# EAGLE board Dual-Port_Logging_Shield-Panel (EAGLE 9.6.2), part 1 of 9
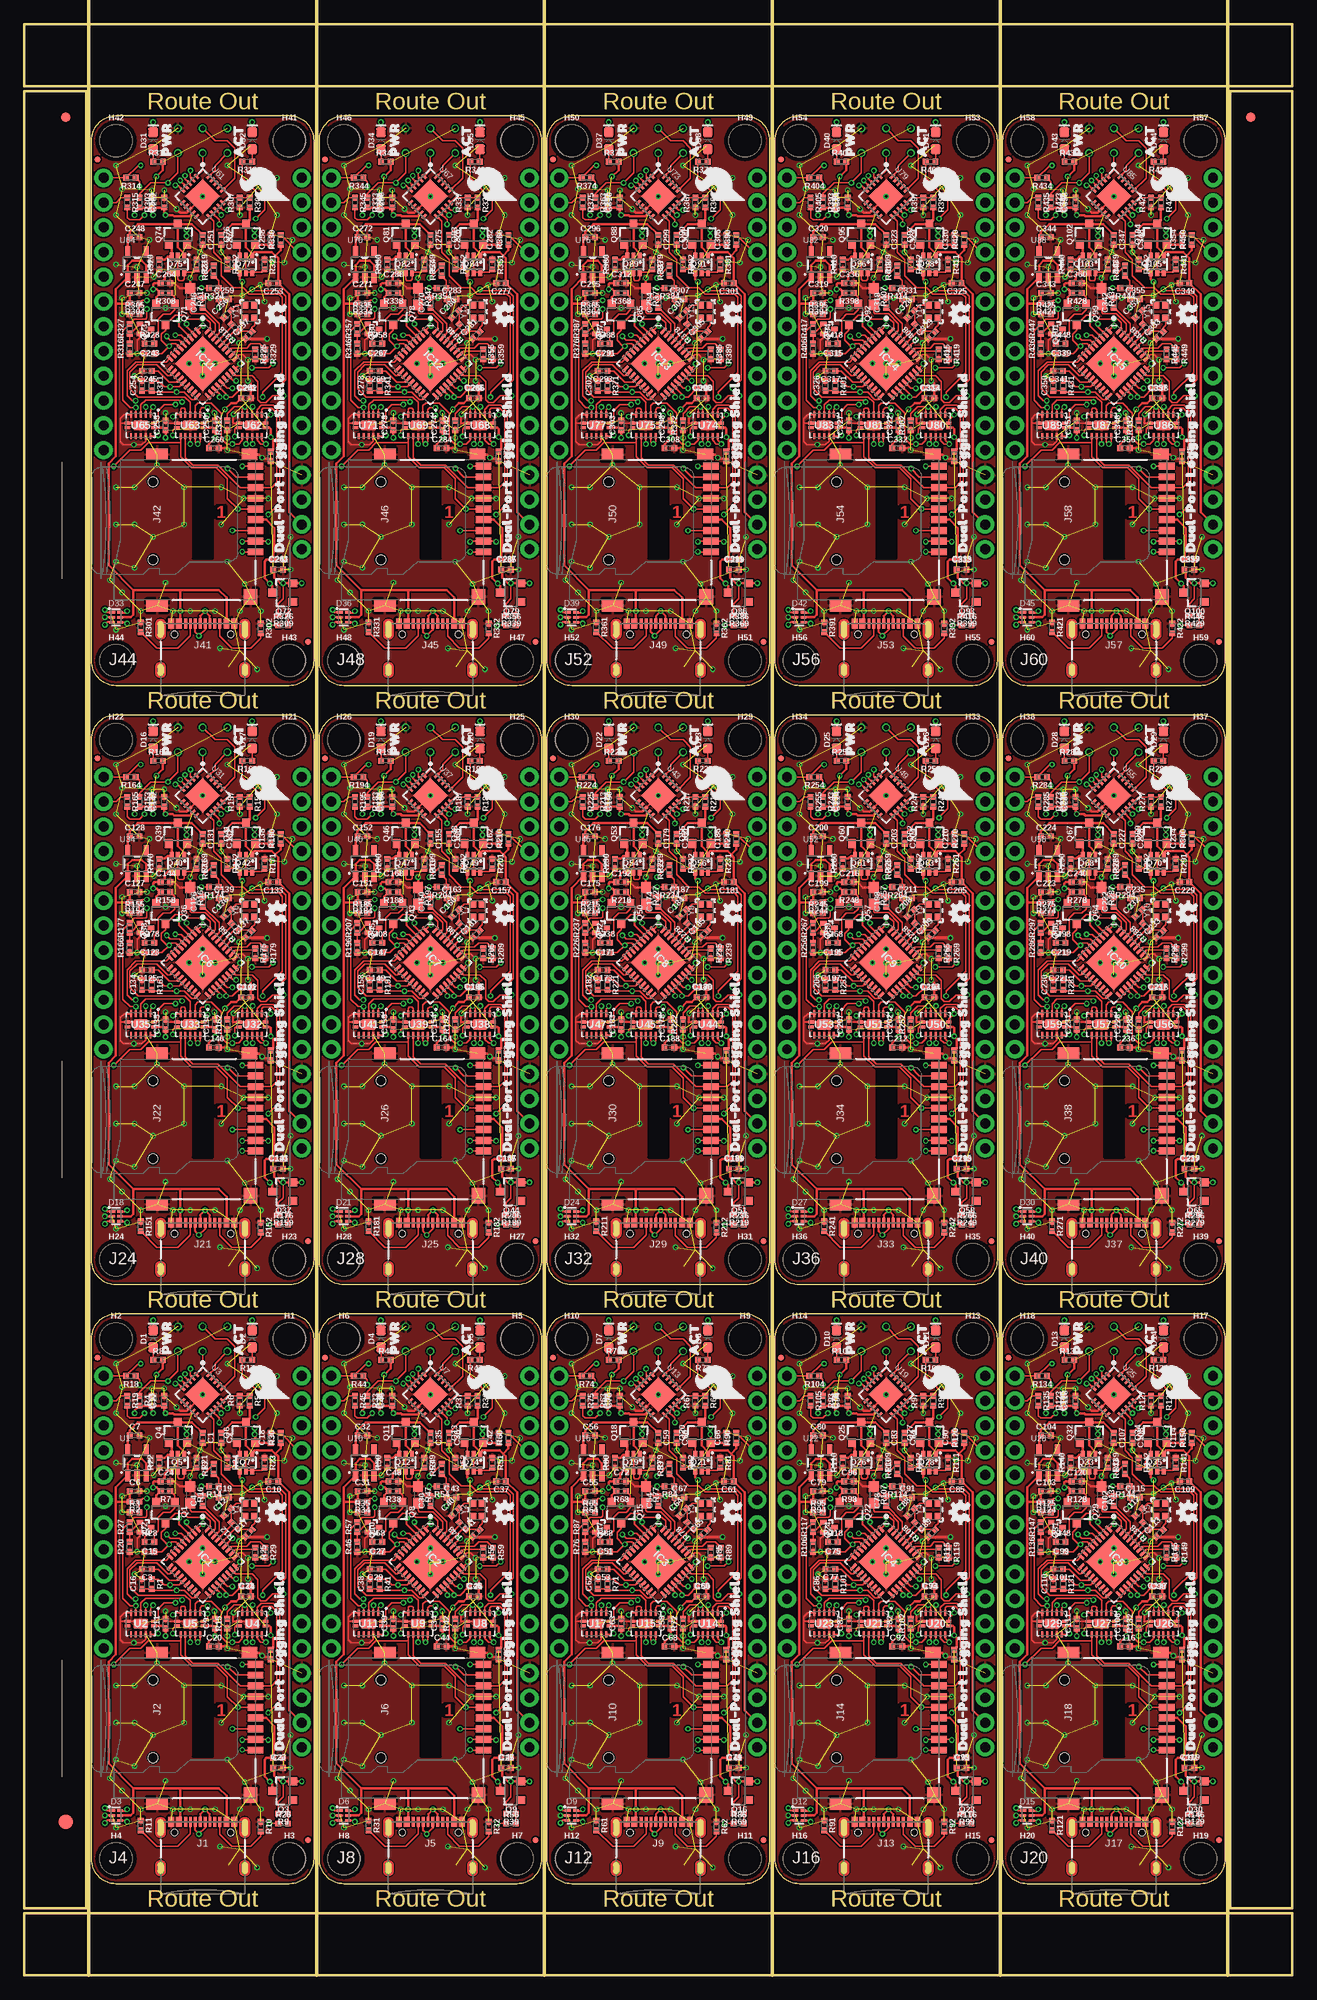
[diagram p0: board, top side]
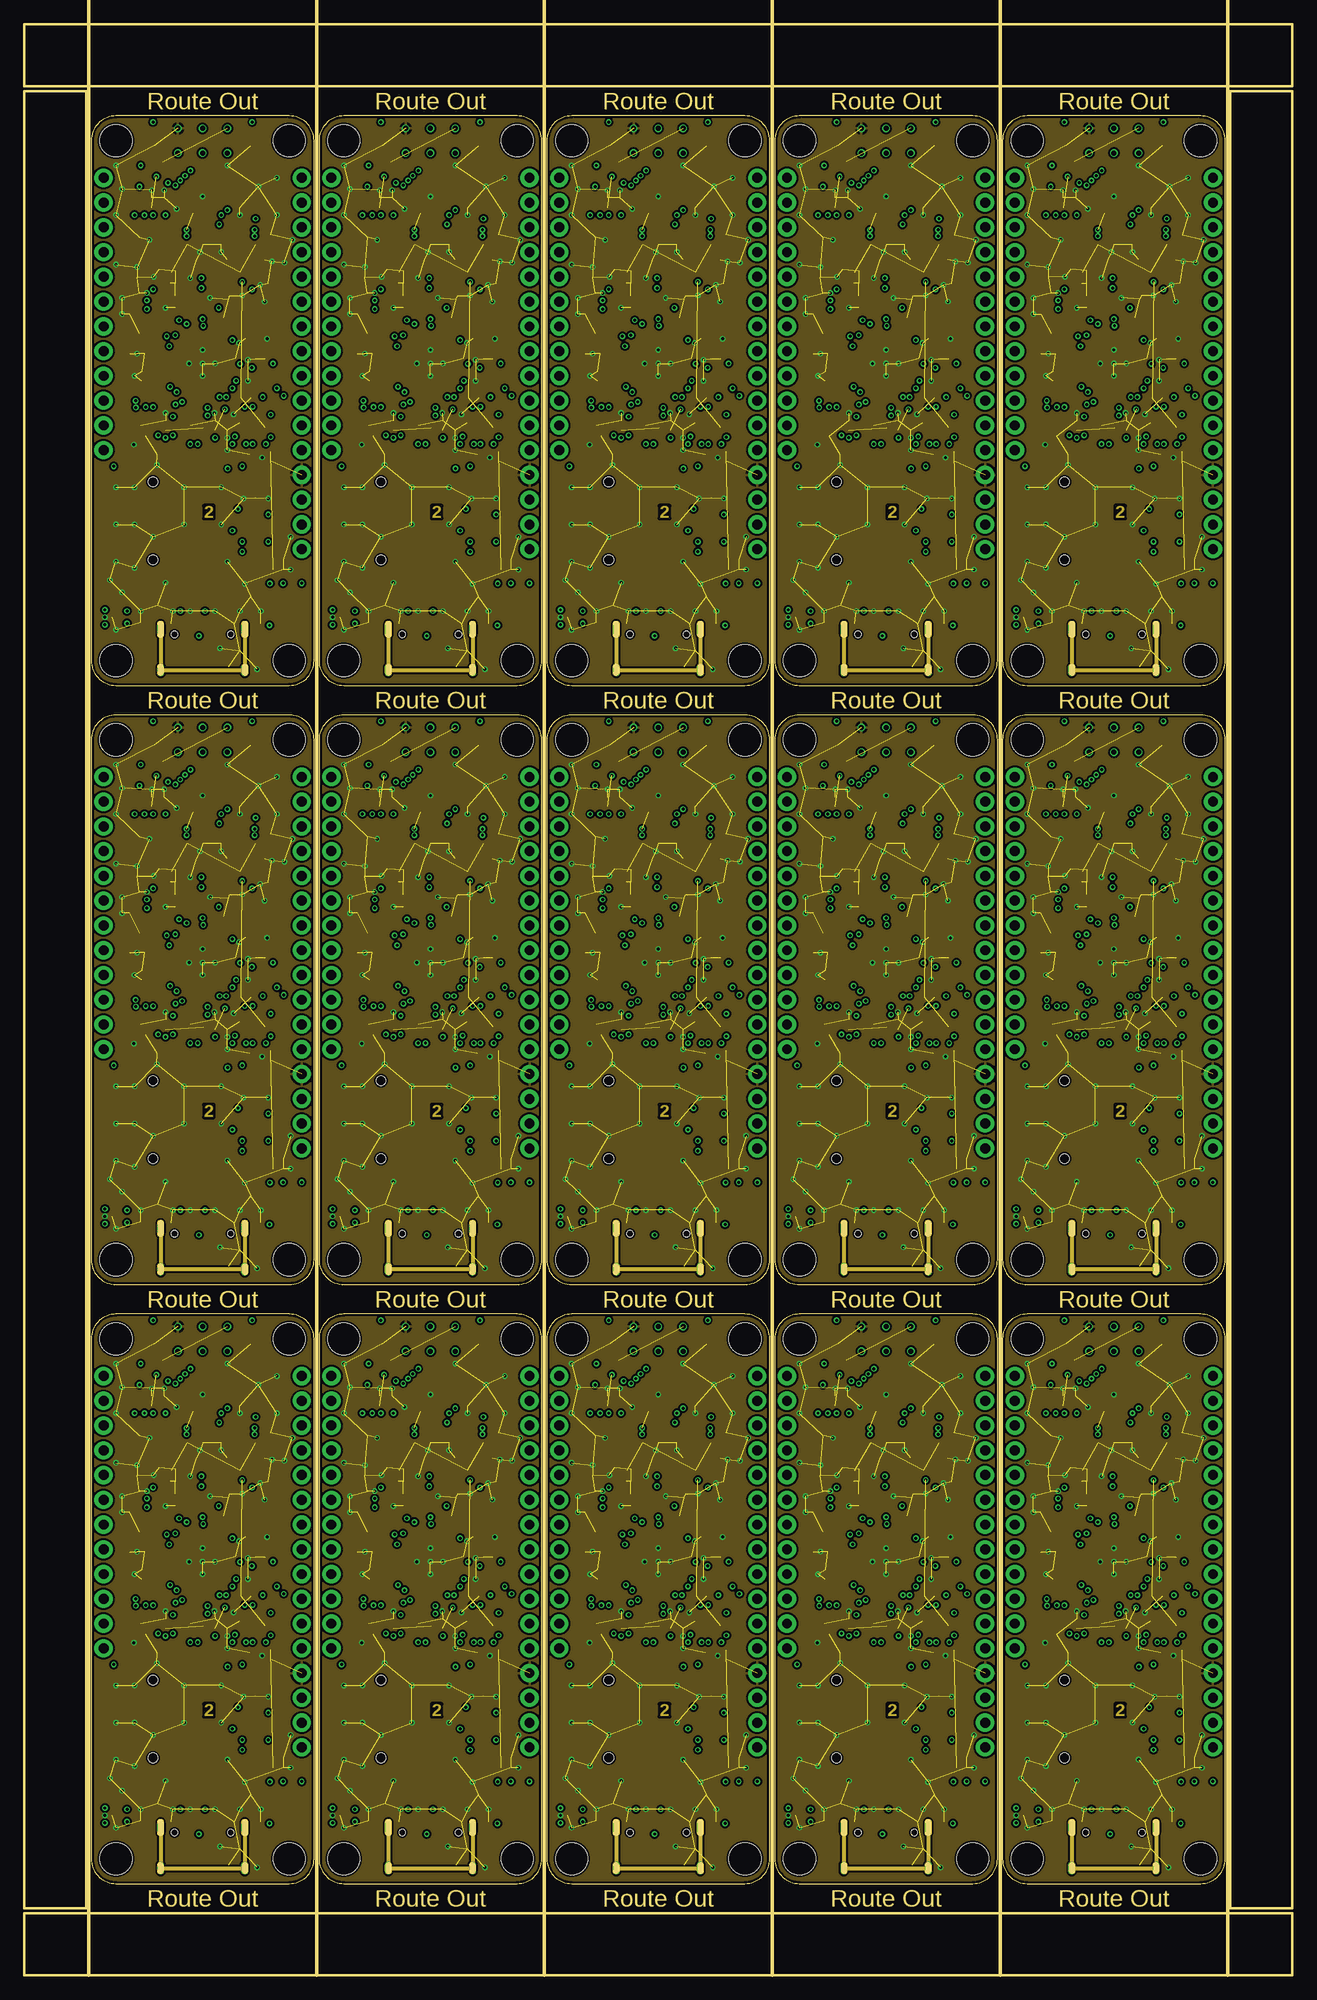
[diagram p1: board, inner layer Route2]
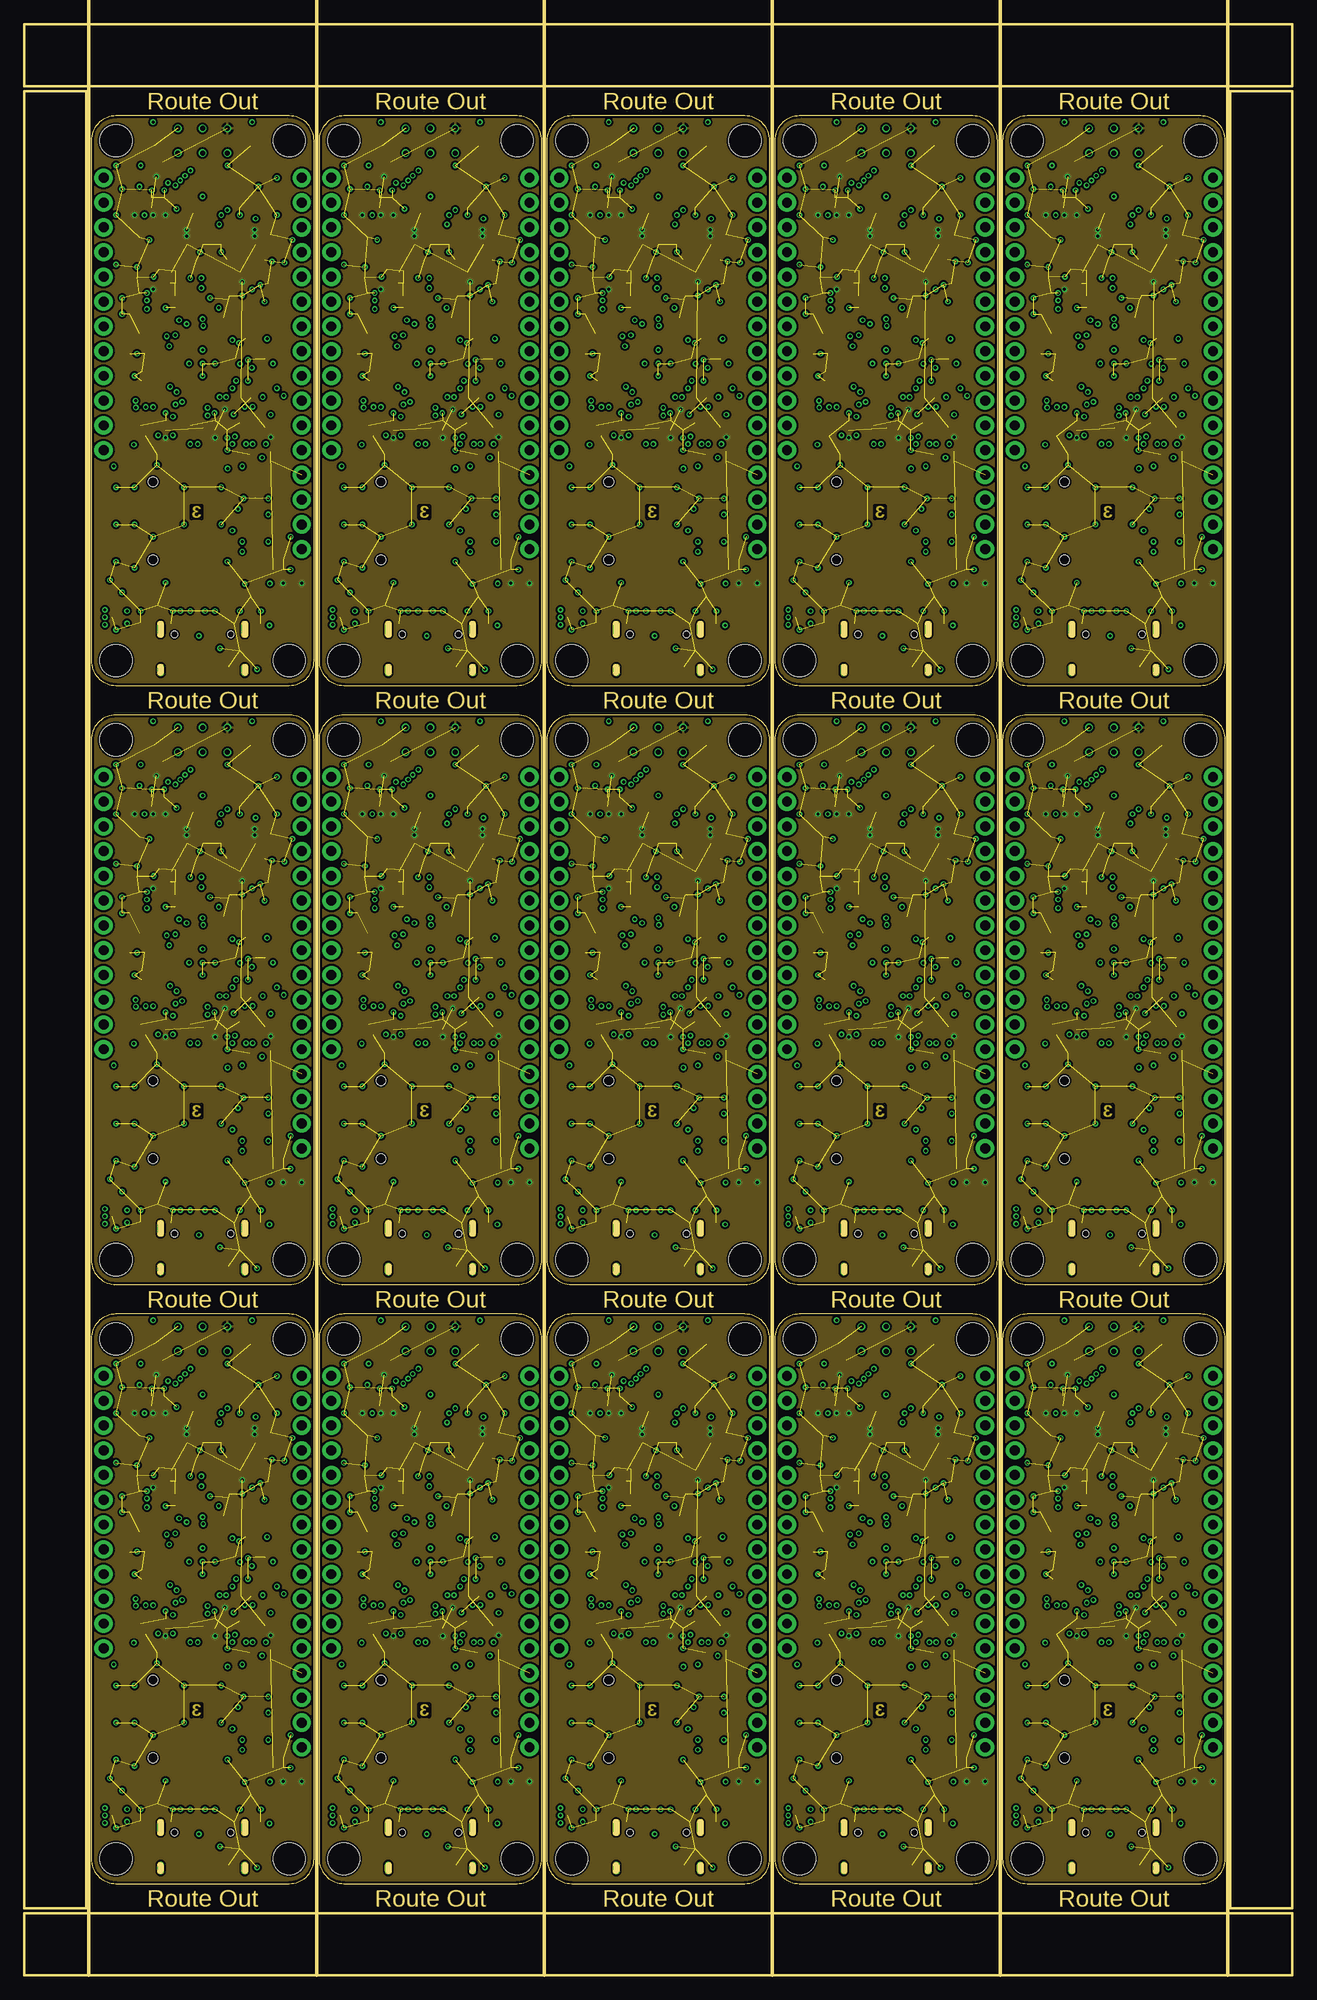
[diagram p2: board, inner layer Route15]
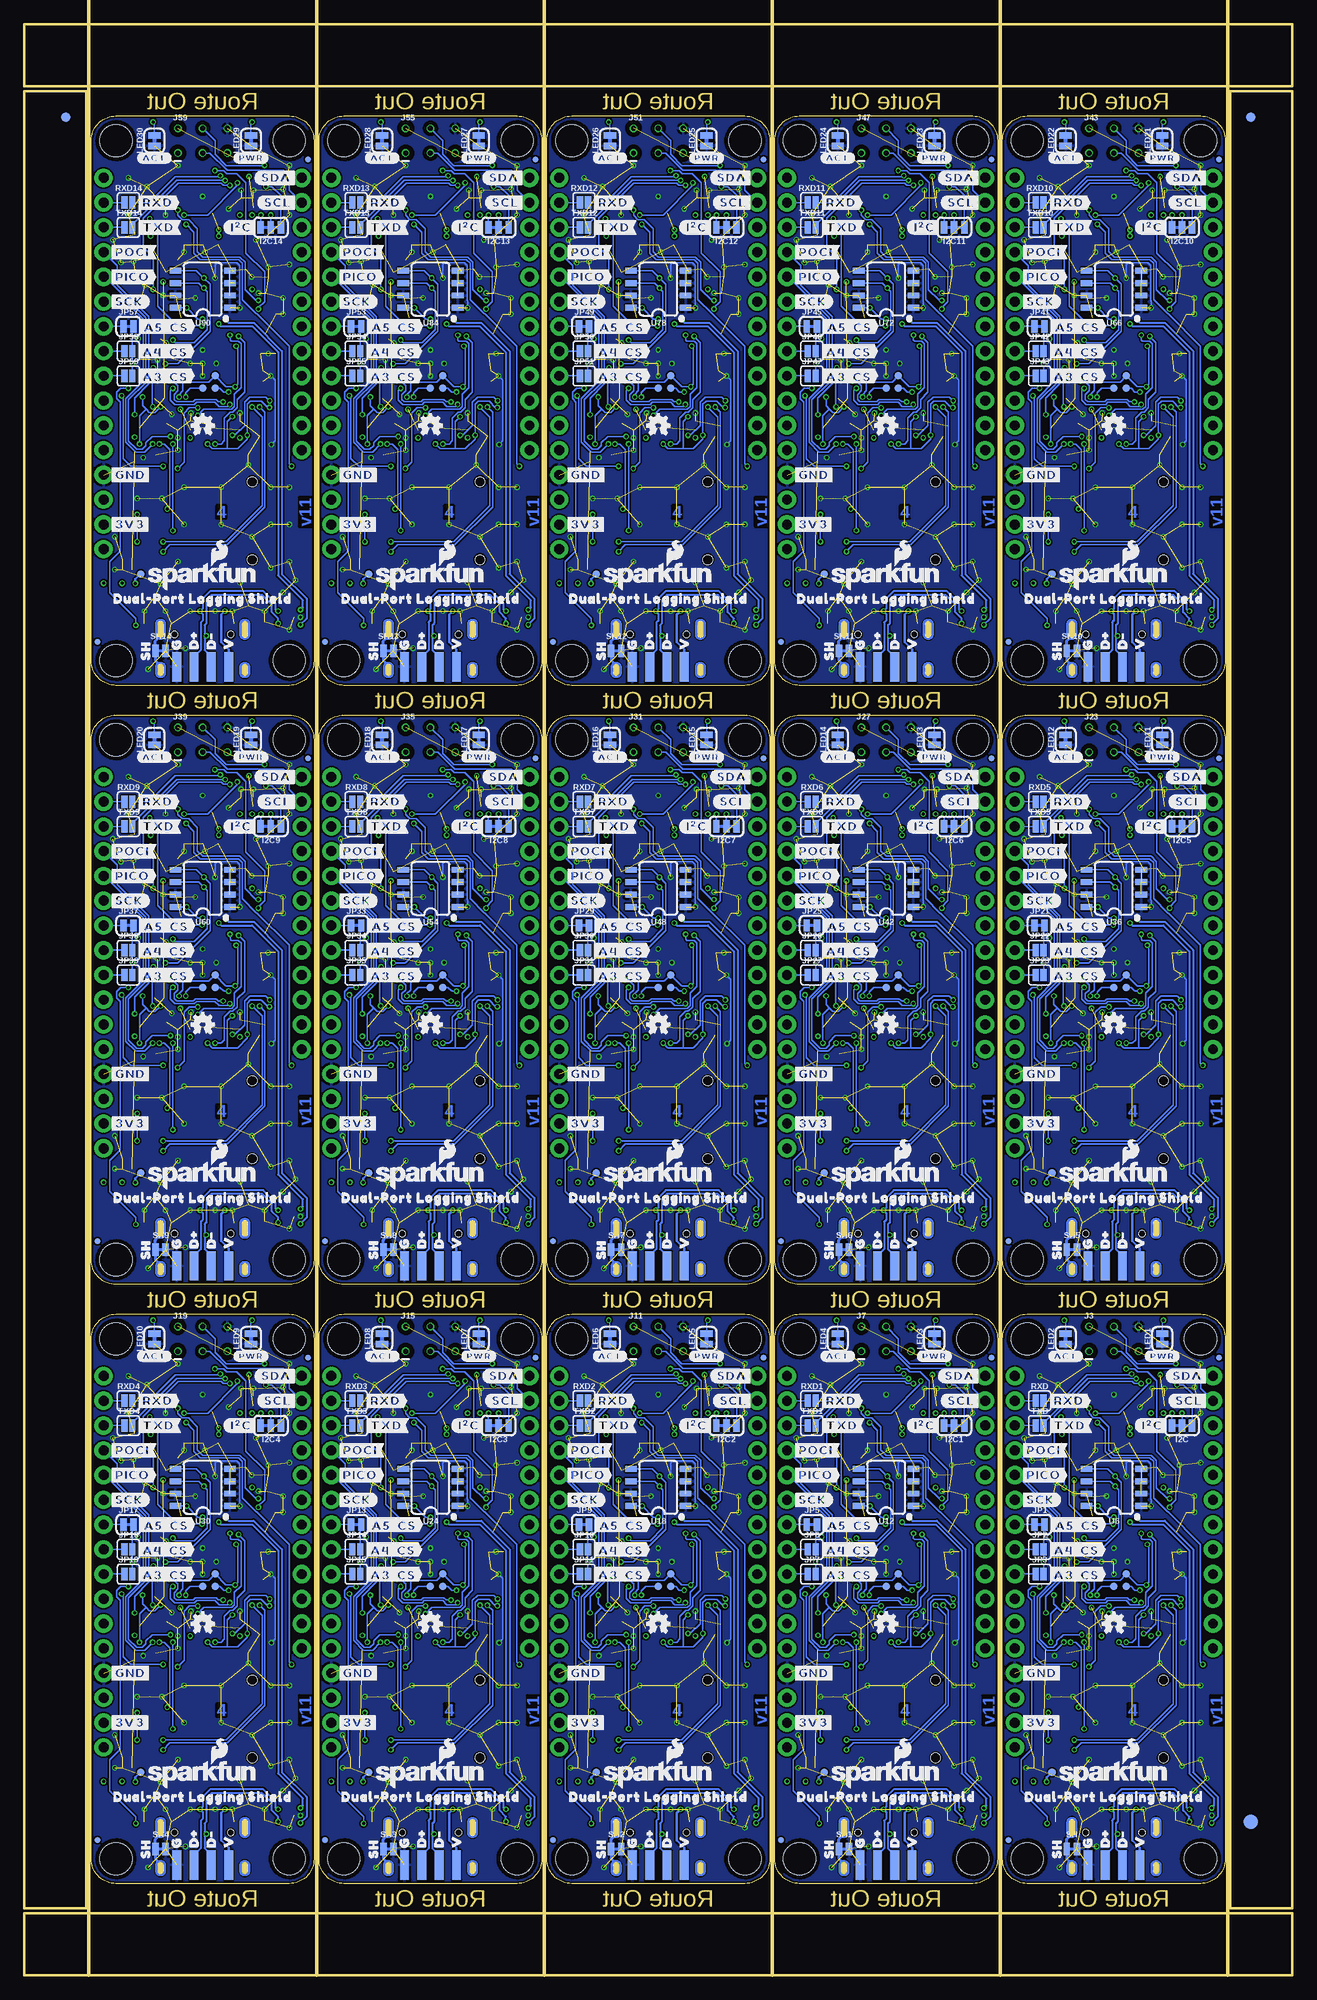
[diagram p3: board, bottom side, seen from below]

Size 130.05 x 200.15 mm. Coordinates in mm from the lower left corner, seen from the top.
Outline: 136 segments
Copper layers (1*2*15*16): Top 0.035559375mm / dielectric 0.47751875mm / Route2 0.035559375mm / dielectric 0.47751875mm / Route15 0.035559375mm / dielectric 0.47751875mm / Bottom 0.035559375mm
Design rules "Dual-Port_Logging_Shield": minimum track width 5mil, minimum drill 0.2mm, track to track 5mil, track to pad 5mil, pad to pad 5mil, via to via 5mil, smd to smd 5mil, copper to edge 7mil, drill to drill 7mil, minimum pad ring 5mil, minimum via ring 5mil, stop-mask expansion 2.5mil, vias tented up to drill 25mil, thermal gap 10mil
bRestrict: area 15.1,63.4 to 16.4,64.6; area 20.2,63.4 to 21.5,64.6; area 20.2,65.9 to 21.5,67.2; area 38.5,63.4 to 39.8,64.6; area 43.6,63.4 to 44.8,64.6; area 43.6,65.9 to 44.8,67.2; area 61.8,63.4 to 63.1,64.6; area 66.9,63.4 to 68.2,64.6; area 66.9,65.9 to 68.2,67.2; area 85.2,63.4 to 86.5,64.6; area 90.3,63.4 to 91.6,64.6; area 90.3,65.9 to 91.6,67.2; 33 more areas; 30 lines
Milling: 6 lines

## Footprints (pad centres in the part's own frame; a part is rotated, then mirrored left to right if it is on the bottom)
0402-TIGHT = smd 0.6 x 0.6: 1 -0.5,0; 2 0.5,0
LED-0603 = smd 1 x 1: A -0.877,0; C 0.877,0
SOT886 = smd 0.61 x 0.25: 1 -0.405,0.5 | smd 0.56 x 0.25: 2 -0.43,0; 3 -0.43,-0.5; 4 0.43,-0.5; 5 0.43,0; 6 0.43,0.5
FIDUCIAL-1X2 = smd 1 x 1: 1 0,0
FIDUCIAL-1.5X3 = smd 1.5 x 1.5: 1 0,0
FIDUCIAL-MICRO = smd 0.635 x 0.635: 1 0,0
PAD.03X.03 = smd 0.762 x 0.762: 1 0,0
STAND-OFF = hole 3.302: 0,0
SMT-JUMPER_3_2-NC_TRACE_SILK = smd 0.66 x 1.27: 1 -1.041,0; 2 0,0; 3 1.041,0
36-QFN = smd 0.8 x 0.25: 1 -2.75,2; 2 -2.75,1.5; 3 -2.75,1; 4 -2.75,0.5; 5 -2.75,0; 6 -2.75,-0.5; 7 -2.75,-1; 8 -2.75,-1.5; 9 -2.75,-2; 19 2.75,-2; 20 2.75,-1.5; 21 2.75,-1; 22 2.75,-0.5; 23 2.75,0; 24 2.75,0.5; 25 2.75,1; 26 2.75,1.5; 27 2.75,2 | smd 0.25 x 0.8: 10 -2,-2.75; 11 -1.5,-2.75; 12 -1,-2.75; 13 -0.5,-2.75; 14 0,-2.75; 15 0.5,-2.75; 16 1,-2.75; 17 1.5,-2.75; 18 2,-2.75; 28 2,2.75; 29 1.5,2.75; 30 1,2.75; 31 0.5,2.75; 32 0,2.75; 33 -0.5,2.75; 34 -1,2.75; 35 -1.5,2.75; 36 -2,2.75 | smd 4 x 4: EPAD 0,0
USB-C-16P_4LAYER-PADS = smd 0.3 x 1: A5 -1.25,-0.34; A6 -0.25,-0.34; A7 0.25,-0.34; A8 1.25,-0.34; B5 1.75,-0.34; B6 0.75,-0.34; B7 -0.75,-0.34; B8 -1.75,-0.34 | smd 0.6 x 1: GND -3.225,-0.34; GND2 3.225,-0.34; VBUS1 -2.45,-0.34; VBUS2 2.45,-0.34 | drill 0.4 pad 0.6 long: SHLD1 -4.318,-0.915; SHLD2 4.318,-0.915; SHLD3 -4.318,-5.095; SHLD4 4.318,-5.095 | hole 0.65: -2.89,-1.445; 2.89,-1.445
MICROSD-EXTERNALPIN = smd 0.7 x 1.6: 1 2.25,10.5; 2 1.15,10.5; 3 0.05,10.5; 4 -1.05,10.5; 5 -2.15,10.5; 6 -3.25,10.5; 7 -4.35,10.5; 8 -5.45,10.5; 9 -6.55,10.5 | smd 1.2 x 1.6: 10 -7.75,9.9 | smd 1.2 x 2.2: 11 -7.75,0.4; 12 7.75,0.4 | smd 1.6 x 1.4: 13 6.85,10 | hole 1: 3.05,0; -4.95,0
2X3_TEST_POINTS = drill 0.508: 1 -2.54,-1.27; 2 -2.54,1.27; 3 0,-1.27; 4 0,1.27; 5 2.54,-1.27; 6 2.54,1.27
THING_PLUS = drill 1.016 pad 1.88: 1 1.27,52.07; 2 1.27,49.53; 3 1.27,46.99; 4 1.27,44.45; 5 1.27,41.91; 6 1.27,39.37; 7 1.27,36.83; 8 1.27,34.29; 9 1.27,31.75; 10 1.27,29.21; 11 1.27,26.67; 12 1.27,24.13; 13 21.59,52.07; 14 21.59,49.53; 15 21.59,46.99; 16 21.59,44.45; 17 21.59,41.91; 18 21.59,39.37; 19 21.59,36.83; 20 21.59,34.29; 21 21.59,31.75; 22 21.59,29.21; 23 21.59,26.67; 24 21.59,24.13; 25 21.59,21.59; 26 21.59,19.05; 27 21.59,16.51; 28 21.59,13.97
SMT-JUMPER_2_NC_TRACE_SILK = smd 0.66 x 1.27: 1 -0.521,0; 2 0.521,0
SMT-JUMPER_2_NO_SILK = smd 0.635 x 1.27: 1 -0.406,0; 2 0.406,0
USB-SOLDER-PADS = smd 3 x 0.9: D+ 0,-0.889; D- 0,0.889; GND 0,-2.667; VBUS 0,2.667
SOT23-3 = smd 0.8 x 0.9: 1 -0.95,-1; 2 0.95,-1; 3 0,1.1
SOT-416FL = smd 0.46 x 0.65: 1 -0.5,-1.1; 2 0.5,-1.1; 3 0,0.05
SOT363_PHILIPS = smd 0.4 x 0.8: 1 -0.65,-0.8; 2 0,-0.8; 3 0.65,-0.8; 4 0.65,0.8; 5 0,0.8; 6 -0.65,0.8
0603 = smd 1.1 x 1: 1 -0.85,0; 2 0.85,0
SMT-JUMPER_2_NC_TRACE_NO-SILK = smd 0.66 x 1.27: 1 -0.521,0; 2 0.521,0
SOT23-5 = smd 0.55 x 1.2: 1 -0.95,-1.3; 2 0,-1.3; 3 0.95,-1.3; 4 0.95,1.3; 5 -0.95,1.3
14-QFN = smd 0.25 x 0.6: 1 -0.25,1.35; 7 -0.25,-1.35; 8 0.25,-1.35; 14 0.25,1.35 | smd 0.6 x 0.25: 2 -1.1,1; 3 -1.1,0.5; 4 -1.1,0; 5 -1.1,-0.5; 6 -1.1,-1; 9 1.1,-1; 10 1.1,-0.5; 11 1.1,0; 12 1.1,0.5; 13 1.1,1 | smd 1 x 1.5: EPAD 0,0
QFN20_20M1 = smd 0.6 x 0.25: 1 -1.9,1; 2 -1.9,0.5; 3 -1.9,0; 4 -1.9,-0.5; 5 -1.9,-1; 11 1.9,-1; 12 1.9,-0.5; 13 1.9,0; 14 1.9,0.5; 15 1.9,1 | smd 0.25 x 0.6: 6 -1,-1.9; 7 -0.5,-1.9; 8 0,-1.9; 9 0.5,-1.9; 10 1,-1.9; 16 1,1.9; 17 0.5,1.9; 18 0,1.9; 19 -0.5,1.9; 20 -1,1.9 | smd 2.5 x 2.5: PAD 0,0
SO08 = smd 0.6 x 1.2: 1 -1.905,-2.8; 2 -0.635,-2.8; 3 0.635,-2.8; 4 1.905,-2.8; 5 1.905,2.8; 6 0.635,2.8; 7 -0.635,2.8; 8 -1.905,2.8
CRYSTAL-SMD-2.0X1.6MM = smd 0.75 x 0.7: 1 -0.675,-0.5; 2 0.675,-0.5; 3 0.675,0.5; 4 -0.675,0.5

## Placement (x,y rotation side)
C1  0.1uF  [0402-TIGHT]  18.29,55.12 270 top
C2  0.1uF  [0402-TIGHT]  20.19,55.12 270 top
C3  2.2uF  [0402-TIGHT]  12.57,41.66 180 top
C4  2.2uF  [0402-TIGHT]  18.29,48.64 90 top
C5  0.1uF  [0402-TIGHT]  26.04,22.29 0 top
C6  2.2uF  [0402-TIGHT]  11.3,49.66 0 top
C7  2.2uF  [0402-TIGHT]  11.3,55.37 0 top
C8  0.1uF  [0402-TIGHT]  25.27,32.89 270 top
C9  0.1uF  [0402-TIGHT]  19.56,36.07 90 top
C10  2.2uF  [0402-TIGHT]  25.53,50.67 180 top
C11  0.1uF  [0402-TIGHT]  14.48,36.07 90 top
C12  12pF  [0402-TIGHT]  20.83,47.5 45 top
C13  0.1uF  [0402-TIGHT]  13.08,58.93 90 top
C14  0.1uF  [0402-TIGHT]  22.73,39.88 0 top
C15  2.2uF  [0402-TIGHT]  12.83,43.43 180 top
C16  0.1uF  [0402-TIGHT]  12.06,40.13 90 top
C17  12pF  [0402-TIGHT]  22.99,45.34 45 top
C18  2.2uF  [0402-TIGHT]  25.27,55.12 90 top
C19  0.1uF  [0402-TIGHT]  20.45,49.02 0 top
C20  10uF  [0402-TIGHT]  19.43,33.72 0 top
C21  10uF  [0402-TIGHT]  22.73,38.86 0 top
C22  10uF  [0402-TIGHT]  14.35,58.93 90 top
C23  10uF  [0402-TIGHT]  26.04,21.27 0 top
C24  10uF  [0402-TIGHT]  14.48,50.67 0 top
C25  0.1uF  [0402-TIGHT]  49.4,22.29 0 top
C26  0.1uF  [0402-TIGHT]  46.1,39.88 0 top
C27  2.2uF  [0402-TIGHT]  36.2,43.43 180 top
C28  0.1uF  [0402-TIGHT]  36.45,58.93 90 top
C29  2.2uF  [0402-TIGHT]  35.94,41.66 180 top
C30  2.2uF  [0402-TIGHT]  41.66,48.64 90 top
C31  2.2uF  [0402-TIGHT]  34.67,49.66 0 top
C32  2.2uF  [0402-TIGHT]  34.67,55.37 0 top
C33  0.1uF  [0402-TIGHT]  48.64,32.89 270 top
C34  0.1uF  [0402-TIGHT]  42.93,36.07 90 top
C35  0.1uF  [0402-TIGHT]  41.66,55.12 270 top
C36  0.1uF  [0402-TIGHT]  43.56,55.12 270 top
C37  2.2uF  [0402-TIGHT]  48.89,50.67 180 top
C38  0.1uF  [0402-TIGHT]  35.43,40.13 90 top
C39  0.1uF  [0402-TIGHT]  37.85,36.07 90 top
C40  12pF  [0402-TIGHT]  44.2,47.5 45 top
C41  12pF  [0402-TIGHT]  46.35,45.34 45 top
C42  2.2uF  [0402-TIGHT]  48.64,55.12 90 top
C43  0.1uF  [0402-TIGHT]  43.81,49.02 0 top
C44  10uF  [0402-TIGHT]  42.8,33.72 0 top
C45  10uF  [0402-TIGHT]  46.1,38.86 0 top
C46  10uF  [0402-TIGHT]  37.72,58.93 90 top
C47  10uF  [0402-TIGHT]  49.4,21.27 0 top
C48  10uF  [0402-TIGHT]  37.85,50.67 0 top
C49  0.1uF  [0402-TIGHT]  72.77,22.29 0 top
C50  0.1uF  [0402-TIGHT]  69.47,39.88 0 top
C51  2.2uF  [0402-TIGHT]  59.56,43.43 180 top
C52  0.1uF  [0402-TIGHT]  59.82,58.93 90 top
C53  2.2uF  [0402-TIGHT]  59.31,41.66 180 top
C54  2.2uF  [0402-TIGHT]  65.02,48.64 90 top
C55  2.2uF  [0402-TIGHT]  58.04,49.66 0 top
C56  2.2uF  [0402-TIGHT]  58.04,55.37 0 top
C57  0.1uF  [0402-TIGHT]  72.01,32.89 270 top
C58  0.1uF  [0402-TIGHT]  66.29,36.07 90 top
C59  0.1uF  [0402-TIGHT]  65.02,55.12 270 top
C60  0.1uF  [0402-TIGHT]  66.93,55.12 270 top
C61  2.2uF  [0402-TIGHT]  72.26,50.67 180 top
C62  0.1uF  [0402-TIGHT]  58.8,40.13 90 top
C63  0.1uF  [0402-TIGHT]  61.21,36.07 90 top
C64  12pF  [0402-TIGHT]  67.56,47.5 45 top
C65  12pF  [0402-TIGHT]  69.72,45.34 45 top
C66  2.2uF  [0402-TIGHT]  72.01,55.12 90 top
C67  0.1uF  [0402-TIGHT]  67.18,49.02 0 top
C68  10uF  [0402-TIGHT]  66.17,33.72 0 top
C69  10uF  [0402-TIGHT]  69.47,38.86 0 top
C70  10uF  [0402-TIGHT]  61.09,58.93 90 top
C71  10uF  [0402-TIGHT]  72.77,21.27 0 top
C72  10uF  [0402-TIGHT]  61.21,50.67 0 top
C73  0.1uF  [0402-TIGHT]  96.14,22.29 0 top
C74  0.1uF  [0402-TIGHT]  92.84,39.88 0 top
C75  2.2uF  [0402-TIGHT]  82.93,43.43 180 top
C76  0.1uF  [0402-TIGHT]  83.19,58.93 90 top
C77  2.2uF  [0402-TIGHT]  82.68,41.66 180 top
C78  2.2uF  [0402-TIGHT]  88.39,48.64 90 top
C79  2.2uF  [0402-TIGHT]  81.41,49.66 0 top
C80  2.2uF  [0402-TIGHT]  81.41,55.37 0 top
C81  0.1uF  [0402-TIGHT]  95.38,32.89 270 top
C82  0.1uF  [0402-TIGHT]  89.66,36.07 90 top
C83  0.1uF  [0402-TIGHT]  88.39,55.12 270 top
C84  0.1uF  [0402-TIGHT]  90.3,55.12 270 top
C85  2.2uF  [0402-TIGHT]  95.63,50.67 180 top
C86  0.1uF  [0402-TIGHT]  82.17,40.13 90 top
C87  0.1uF  [0402-TIGHT]  84.58,36.07 90 top
C88  12pF  [0402-TIGHT]  90.93,47.5 45 top
C89  12pF  [0402-TIGHT]  93.09,45.34 45 top
C90  2.2uF  [0402-TIGHT]  95.38,55.12 90 top
C91  0.1uF  [0402-TIGHT]  90.55,49.02 0 top
C92  10uF  [0402-TIGHT]  89.54,33.72 0 top
C93  10uF  [0402-TIGHT]  92.84,38.86 0 top
C94  10uF  [0402-TIGHT]  84.45,58.93 90 top
C95  10uF  [0402-TIGHT]  96.14,21.27 0 top
C96  10uF  [0402-TIGHT]  84.58,50.67 0 top
C97  0.1uF  [0402-TIGHT]  119.51,22.29 0 top
C98  0.1uF  [0402-TIGHT]  116.2,39.88 0 top
C99  2.2uF  [0402-TIGHT]  106.3,43.43 180 top
C100  0.1uF  [0402-TIGHT]  106.55,58.93 90 top
C101  2.2uF  [0402-TIGHT]  106.05,41.66 180 top
C102  2.2uF  [0402-TIGHT]  111.76,48.64 90 top
C103  2.2uF  [0402-TIGHT]  104.78,49.66 0 top
C104  2.2uF  [0402-TIGHT]  104.78,55.37 0 top
C105  0.1uF  [0402-TIGHT]  118.75,32.89 270 top
C106  0.1uF  [0402-TIGHT]  113.03,36.07 90 top
C107  0.1uF  [0402-TIGHT]  111.76,55.12 270 top
C108  0.1uF  [0402-TIGHT]  113.67,55.12 270 top
C109  2.2uF  [0402-TIGHT]  119,50.67 180 top
C110  0.1uF  [0402-TIGHT]  105.54,40.13 90 top
C111  0.1uF  [0402-TIGHT]  107.95,36.07 90 top
C112  12pF  [0402-TIGHT]  114.3,47.5 45 top
C113  12pF  [0402-TIGHT]  116.46,45.34 45 top
C114  2.2uF  [0402-TIGHT]  118.75,55.12 90 top
C115  0.1uF  [0402-TIGHT]  113.92,49.02 0 top
C116  10uF  [0402-TIGHT]  112.9,33.72 0 top
C117  10uF  [0402-TIGHT]  116.2,38.86 0 top
C118  10uF  [0402-TIGHT]  107.82,58.93 90 top
C119  10uF  [0402-TIGHT]  119.51,21.27 0 top
C120  10uF  [0402-TIGHT]  107.95,50.67 0 top
C121  0.1uF  [0402-TIGHT]  26.04,83.76 0 top
C122  0.1uF  [0402-TIGHT]  22.73,101.35 0 top
C123  2.2uF  [0402-TIGHT]  12.83,104.9 180 top
C124  0.1uF  [0402-TIGHT]  13.08,120.4 90 top
C125  2.2uF  [0402-TIGHT]  12.57,103.12 180 top
C126  2.2uF  [0402-TIGHT]  18.29,110.11 90 top
C127  2.2uF  [0402-TIGHT]  11.3,111.12 0 top
C128  2.2uF  [0402-TIGHT]  11.3,116.84 0 top
C129  0.1uF  [0402-TIGHT]  25.27,94.36 270 top
C130  0.1uF  [0402-TIGHT]  19.56,97.54 90 top
C131  0.1uF  [0402-TIGHT]  18.29,116.59 270 top
C132  0.1uF  [0402-TIGHT]  20.19,116.59 270 top
C133  2.2uF  [0402-TIGHT]  25.53,112.14 180 top
C134  0.1uF  [0402-TIGHT]  12.06,101.6 90 top
C135  0.1uF  [0402-TIGHT]  14.48,97.54 90 top
C136  12pF  [0402-TIGHT]  20.83,108.97 45 top
C137  12pF  [0402-TIGHT]  22.99,106.81 45 top
C138  2.2uF  [0402-TIGHT]  25.27,116.59 90 top
C139  0.1uF  [0402-TIGHT]  20.45,110.49 0 top
C140  10uF  [0402-TIGHT]  19.43,95.19 0 top
C141  10uF  [0402-TIGHT]  22.73,100.33 0 top
C142  10uF  [0402-TIGHT]  14.35,120.4 90 top
C143  10uF  [0402-TIGHT]  26.04,82.74 0 top
C144  10uF  [0402-TIGHT]  14.48,112.14 0 top
C145  0.1uF  [0402-TIGHT]  49.4,83.76 0 top
C146  0.1uF  [0402-TIGHT]  46.1,101.35 0 top
C147  2.2uF  [0402-TIGHT]  36.2,104.9 180 top
C148  0.1uF  [0402-TIGHT]  36.45,120.4 90 top
C149  2.2uF  [0402-TIGHT]  35.94,103.12 180 top
C150  2.2uF  [0402-TIGHT]  41.66,110.11 90 top
C151  2.2uF  [0402-TIGHT]  34.67,111.12 0 top
C152  2.2uF  [0402-TIGHT]  34.67,116.84 0 top
C153  0.1uF  [0402-TIGHT]  48.64,94.36 270 top
C154  0.1uF  [0402-TIGHT]  42.93,97.54 90 top
C155  0.1uF  [0402-TIGHT]  41.66,116.59 270 top
C156  0.1uF  [0402-TIGHT]  43.56,116.59 270 top
C157  2.2uF  [0402-TIGHT]  48.89,112.14 180 top
C158  0.1uF  [0402-TIGHT]  35.43,101.6 90 top
C159  0.1uF  [0402-TIGHT]  37.85,97.54 90 top
C160  12pF  [0402-TIGHT]  44.2,108.97 45 top
C161  12pF  [0402-TIGHT]  46.35,106.81 45 top
C162  2.2uF  [0402-TIGHT]  48.64,116.59 90 top
C163  0.1uF  [0402-TIGHT]  43.81,110.49 0 top
C164  10uF  [0402-TIGHT]  42.8,95.19 0 top
C165  10uF  [0402-TIGHT]  46.1,100.33 0 top
C166  10uF  [0402-TIGHT]  37.72,120.4 90 top
C167  10uF  [0402-TIGHT]  49.4,82.74 0 top
C168  10uF  [0402-TIGHT]  37.85,112.14 0 top
C169  0.1uF  [0402-TIGHT]  72.77,83.76 0 top
C170  0.1uF  [0402-TIGHT]  69.47,101.35 0 top
C171  2.2uF  [0402-TIGHT]  59.56,104.9 180 top
C172  0.1uF  [0402-TIGHT]  59.82,120.4 90 top
C173  2.2uF  [0402-TIGHT]  59.31,103.12 180 top
C174  2.2uF  [0402-TIGHT]  65.02,110.11 90 top
C175  2.2uF  [0402-TIGHT]  58.04,111.12 0 top
C176  2.2uF  [0402-TIGHT]  58.04,116.84 0 top
C177  0.1uF  [0402-TIGHT]  72.01,94.36 270 top
C178  0.1uF  [0402-TIGHT]  66.29,97.54 90 top
C179  0.1uF  [0402-TIGHT]  65.02,116.59 270 top
C180  0.1uF  [0402-TIGHT]  66.93,116.59 270 top
C181  2.2uF  [0402-TIGHT]  72.26,112.14 180 top
C182  0.1uF  [0402-TIGHT]  58.8,101.6 90 top
C183  0.1uF  [0402-TIGHT]  61.21,97.54 90 top
C184  12pF  [0402-TIGHT]  67.56,108.97 45 top
C185  12pF  [0402-TIGHT]  69.72,106.81 45 top
C186  2.2uF  [0402-TIGHT]  72.01,116.59 90 top
C187  0.1uF  [0402-TIGHT]  67.18,110.49 0 top
C188  10uF  [0402-TIGHT]  66.17,95.19 0 top
C189  10uF  [0402-TIGHT]  69.47,100.33 0 top
C190  10uF  [0402-TIGHT]  61.09,120.4 90 top
C191  10uF  [0402-TIGHT]  72.77,82.74 0 top
C192  10uF  [0402-TIGHT]  61.21,112.14 0 top
C193  0.1uF  [0402-TIGHT]  96.14,83.76 0 top
C194  0.1uF  [0402-TIGHT]  92.84,101.35 0 top
C195  2.2uF  [0402-TIGHT]  82.93,104.9 180 top
C196  0.1uF  [0402-TIGHT]  83.19,120.4 90 top
C197  2.2uF  [0402-TIGHT]  82.68,103.12 180 top
C198  2.2uF  [0402-TIGHT]  88.39,110.11 90 top
C199  2.2uF  [0402-TIGHT]  81.41,111.12 0 top
C200  2.2uF  [0402-TIGHT]  81.41,116.84 0 top
C201  0.1uF  [0402-TIGHT]  95.38,94.36 270 top
C202  0.1uF  [0402-TIGHT]  89.66,97.54 90 top
C203  0.1uF  [0402-TIGHT]  88.39,116.59 270 top
C204  0.1uF  [0402-TIGHT]  90.3,116.59 270 top
C205  2.2uF  [0402-TIGHT]  95.63,112.14 180 top
C206  0.1uF  [0402-TIGHT]  82.17,101.6 90 top
C207  0.1uF  [0402-TIGHT]  84.58,97.54 90 top
C208  12pF  [0402-TIGHT]  90.93,108.97 45 top
C209  12pF  [0402-TIGHT]  93.09,106.81 45 top
C210  2.2uF  [0402-TIGHT]  95.38,116.59 90 top
C211  0.1uF  [0402-TIGHT]  90.55,110.49 0 top
C212  10uF  [0402-TIGHT]  89.54,95.19 0 top
C213  10uF  [0402-TIGHT]  92.84,100.33 0 top
C214  10uF  [0402-TIGHT]  84.45,120.4 90 top
C215  10uF  [0402-TIGHT]  96.14,82.74 0 top
C216  10uF  [0402-TIGHT]  84.58,112.14 0 top
C217  0.1uF  [0402-TIGHT]  119.51,83.76 0 top
C218  0.1uF  [0402-TIGHT]  116.2,101.35 0 top
C219  2.2uF  [0402-TIGHT]  106.3,104.9 180 top
C220  0.1uF  [0402-TIGHT]  106.55,120.4 90 top
C221  2.2uF  [0402-TIGHT]  106.05,103.12 180 top
C222  2.2uF  [0402-TIGHT]  111.76,110.11 90 top
C223  2.2uF  [0402-TIGHT]  104.78,111.12 0 top
C224  2.2uF  [0402-TIGHT]  104.78,116.84 0 top
C225  0.1uF  [0402-TIGHT]  118.75,94.36 270 top
C226  0.1uF  [0402-TIGHT]  113.03,97.54 90 top
C227  0.1uF  [0402-TIGHT]  111.76,116.59 270 top
C228  0.1uF  [0402-TIGHT]  113.67,116.59 270 top
C229  2.2uF  [0402-TIGHT]  119,112.14 180 top
C230  0.1uF  [0402-TIGHT]  105.54,101.6 90 top
C231  0.1uF  [0402-TIGHT]  107.95,97.54 90 top
C232  12pF  [0402-TIGHT]  114.3,108.97 45 top
C233  12pF  [0402-TIGHT]  116.46,106.81 45 top
C234  2.2uF  [0402-TIGHT]  118.75,116.59 90 top
C235  0.1uF  [0402-TIGHT]  113.92,110.49 0 top
C236  10uF  [0402-TIGHT]  112.9,95.19 0 top
C237  10uF  [0402-TIGHT]  116.2,100.33 0 top
C238  10uF  [0402-TIGHT]  107.82,120.4 90 top
C239  10uF  [0402-TIGHT]  119.51,82.74 0 top
C240  10uF  [0402-TIGHT]  107.95,112.14 0 top
C241  0.1uF  [0402-TIGHT]  26.04,145.22 0 top
C242  0.1uF  [0402-TIGHT]  22.73,162.81 0 top
C243  2.2uF  [0402-TIGHT]  12.83,166.37 180 top
C244  0.1uF  [0402-TIGHT]  13.08,181.86 90 top
C245  2.2uF  [0402-TIGHT]  12.57,164.59 180 top
C246  2.2uF  [0402-TIGHT]  18.29,171.58 90 top
C247  2.2uF  [0402-TIGHT]  11.3,172.59 0 top
C248  2.2uF  [0402-TIGHT]  11.3,178.31 0 top
C249  0.1uF  [0402-TIGHT]  25.27,155.83 270 top
C250  0.1uF  [0402-TIGHT]  19.56,159 90 top
C251  0.1uF  [0402-TIGHT]  18.29,178.05 270 top
C252  0.1uF  [0402-TIGHT]  20.19,178.05 270 top
C253  2.2uF  [0402-TIGHT]  25.53,173.61 180 top
C254  0.1uF  [0402-TIGHT]  12.06,163.07 90 top
C255  0.1uF  [0402-TIGHT]  14.48,159 90 top
C256  12pF  [0402-TIGHT]  20.83,170.43 45 top
C257  12pF  [0402-TIGHT]  22.99,168.28 45 top
C258  2.2uF  [0402-TIGHT]  25.27,178.05 90 top
C259  0.1uF  [0402-TIGHT]  20.45,171.96 0 top
C260  10uF  [0402-TIGHT]  19.43,156.65 0 top
C261  10uF  [0402-TIGHT]  22.73,161.8 0 top
C262  10uF  [0402-TIGHT]  14.35,181.86 90 top
C263  10uF  [0402-TIGHT]  26.04,144.21 0 top
C264  10uF  [0402-TIGHT]  14.48,173.61 0 top
C265  0.1uF  [0402-TIGHT]  49.4,145.22 0 top
C266  0.1uF  [0402-TIGHT]  46.1,162.81 0 top
C267  2.2uF  [0402-TIGHT]  36.2,166.37 180 top
C268  0.1uF  [0402-TIGHT]  36.45,181.86 90 top
C269  2.2uF  [0402-TIGHT]  35.94,164.59 180 top
C270  2.2uF  [0402-TIGHT]  41.66,171.58 90 top
C271  2.2uF  [0402-TIGHT]  34.67,172.59 0 top
C272  2.2uF  [0402-TIGHT]  34.67,178.31 0 top
C273  0.1uF  [0402-TIGHT]  48.64,155.83 270 top
C274  0.1uF  [0402-TIGHT]  42.93,159 90 top
C275  0.1uF  [0402-TIGHT]  41.66,178.05 270 top
C276  0.1uF  [0402-TIGHT]  43.56,178.05 270 top
C277  2.2uF  [0402-TIGHT]  48.89,173.61 180 top
C278  0.1uF  [0402-TIGHT]  35.43,163.07 90 top
C279  0.1uF  [0402-TIGHT]  37.85,159 90 top
C280  12pF  [0402-TIGHT]  44.2,170.43 45 top
C281  12pF  [0402-TIGHT]  46.35,168.28 45 top
C282  2.2uF  [0402-TIGHT]  48.64,178.05 90 top
C283  0.1uF  [0402-TIGHT]  43.81,171.96 0 top
C284  10uF  [0402-TIGHT]  42.8,156.65 0 top
C285  10uF  [0402-TIGHT]  46.1,161.8 0 top
C286  10uF  [0402-TIGHT]  37.72,181.86 90 top
C287  10uF  [0402-TIGHT]  49.4,144.21 0 top
C288  10uF  [0402-TIGHT]  37.85,173.61 0 top
C289  0.1uF  [0402-TIGHT]  72.77,145.22 0 top
C290  0.1uF  [0402-TIGHT]  69.47,162.81 0 top
C291  2.2uF  [0402-TIGHT]  59.56,166.37 180 top
C292  0.1uF  [0402-TIGHT]  59.82,181.86 90 top
C293  2.2uF  [0402-TIGHT]  59.31,164.59 180 top
C294  2.2uF  [0402-TIGHT]  65.02,171.58 90 top
C295  2.2uF  [0402-TIGHT]  58.04,172.59 0 top
C296  2.2uF  [0402-TIGHT]  58.04,178.31 0 top
C297  0.1uF  [0402-TIGHT]  72.01,155.83 270 top
C298  0.1uF  [0402-TIGHT]  66.29,159 90 top
C299  0.1uF  [0402-TIGHT]  65.02,178.05 270 top
C300  0.1uF  [0402-TIGHT]  66.93,178.05 270 top
C301  2.2uF  [0402-TIGHT]  72.26,173.61 180 top
C302  0.1uF  [0402-TIGHT]  58.8,163.07 90 top
C303  0.1uF  [0402-TIGHT]  61.21,159 90 top
C304  12pF  [0402-TIGHT]  67.56,170.43 45 top
C305  12pF  [0402-TIGHT]  69.72,168.28 45 top
C306  2.2uF  [0402-TIGHT]  72.01,178.05 90 top
C307  0.1uF  [0402-TIGHT]  67.18,171.96 0 top
C308  10uF  [0402-TIGHT]  66.17,156.65 0 top
C309  10uF  [0402-TIGHT]  69.47,161.8 0 top
C310  10uF  [0402-TIGHT]  61.09,181.86 90 top
C311  10uF  [0402-TIGHT]  72.77,144.21 0 top
C312  10uF  [0402-TIGHT]  61.21,173.61 0 top
C313  0.1uF  [0402-TIGHT]  96.14,145.22 0 top
C314  0.1uF  [0402-TIGHT]  92.84,162.81 0 top
C315  2.2uF  [0402-TIGHT]  82.93,166.37 180 top
C316  0.1uF  [0402-TIGHT]  83.19,181.86 90 top
C317  2.2uF  [0402-TIGHT]  82.68,164.59 180 top
C318  2.2uF  [0402-TIGHT]  88.39,171.58 90 top
C319  2.2uF  [0402-TIGHT]  81.41,172.59 0 top
C320  2.2uF  [0402-TIGHT]  81.41,178.31 0 top
C321  0.1uF  [0402-TIGHT]  95.38,155.83 270 top
C322  0.1uF  [0402-TIGHT]  89.66,159 90 top
C323  0.1uF  [0402-TIGHT]  88.39,178.05 270 top
C324  0.1uF  [0402-TIGHT]  90.3,178.05 270 top
C325  2.2uF  [0402-TIGHT]  95.63,173.61 180 top
C326  0.1uF  [0402-TIGHT]  82.17,163.07 90 top
C327  0.1uF  [0402-TIGHT]  84.58,159 90 top
C328  12pF  [0402-TIGHT]  90.93,170.43 45 top
C329  12pF  [0402-TIGHT]  93.09,168.28 45 top
C330  2.2uF  [0402-TIGHT]  95.38,178.05 90 top
C331  0.1uF  [0402-TIGHT]  90.55,171.96 0 top
C332  10uF  [0402-TIGHT]  89.54,156.65 0 top
C333  10uF  [0402-TIGHT]  92.84,161.8 0 top
C334  10uF  [0402-TIGHT]  84.45,181.86 90 top
C335  10uF  [0402-TIGHT]  96.14,144.21 0 top
C336  10uF  [0402-TIGHT]  84.58,173.61 0 top
C337  0.1uF  [0402-TIGHT]  119.51,145.22 0 top
C338  0.1uF  [0402-TIGHT]  116.2,162.81 0 top
C339  2.2uF  [0402-TIGHT]  106.3,166.37 180 top
C340  0.1uF  [0402-TIGHT]  106.55,181.86 90 top
C341  2.2uF  [0402-TIGHT]  106.05,164.59 180 top
C342  2.2uF  [0402-TIGHT]  111.76,171.58 90 top
C343  2.2uF  [0402-TIGHT]  104.78,172.59 0 top
C344  2.2uF  [0402-TIGHT]  104.78,178.31 0 top
C345  0.1uF  [0402-TIGHT]  118.75,155.83 270 top
C346  0.1uF  [0402-TIGHT]  113.03,159 90 top
C347  0.1uF  [0402-TIGHT]  111.76,178.05 270 top
C348  0.1uF  [0402-TIGHT]  113.67,178.05 270 top
C349  2.2uF  [0402-TIGHT]  119,173.61 180 top
C350  0.1uF  [0402-TIGHT]  105.54,163.07 90 top
C351  0.1uF  [0402-TIGHT]  107.95,159 90 top
C352  12pF  [0402-TIGHT]  114.3,170.43 45 top
C353  12pF  [0402-TIGHT]  116.46,168.28 45 top
C354  2.2uF  [0402-TIGHT]  118.75,178.05 90 top
C355  0.1uF  [0402-TIGHT]  113.92,171.96 0 top
C356  10uF  [0402-TIGHT]  112.9,156.65 0 top
C357  10uF  [0402-TIGHT]  116.2,161.8 0 top
C358  10uF  [0402-TIGHT]  107.82,181.86 90 top
C359  10uF  [0402-TIGHT]  119.51,144.21 0 top
C360  10uF  [0402-TIGHT]  107.95,173.61 0 top
D1  RED  [LED-0603]  13.21,65.28 90 top
D2  Yellow  [LED-0603]  23.37,65.28 90 top
D3  PRTR5V0U2F  [SOT886]  9.4,16.38 0 top
D4  RED  [LED-0603]  36.58,65.28 90 top
D5  Yellow  [LED-0603]  46.74,65.28 90 top
D6  PRTR5V0U2F  [SOT886]  32.77,16.38 0 top
D7  RED  [LED-0603]  59.94,65.28 90 top
D8  Yellow  [LED-0603]  70.1,65.28 90 top
D9  PRTR5V0U2F  [SOT886]  56.13,16.38 0 top
D10  RED  [LED-0603]  83.31,65.28 90 top
D11  Yellow  [LED-0603]  93.47,65.28 90 top
D12  PRTR5V0U2F  [SOT886]  79.5,16.38 0 top
D13  RED  [LED-0603]  106.68,65.28 90 top
D14  Yellow  [LED-0603]  116.84,65.28 90 top
D15  PRTR5V0U2F  [SOT886]  102.87,16.38 0 top
D16  RED  [LED-0603]  13.21,126.75 90 top
D17  Yellow  [LED-0603]  23.37,126.75 90 top
D18  PRTR5V0U2F  [SOT886]  9.4,77.85 0 top
D19  RED  [LED-0603]  36.58,126.75 90 top
D20  Yellow  [LED-0603]  46.74,126.75 90 top
D21  PRTR5V0U2F  [SOT886]  32.77,77.85 0 top
D22  RED  [LED-0603]  59.94,126.75 90 top
D23  Yellow  [LED-0603]  70.1,126.75 90 top
D24  PRTR5V0U2F  [SOT886]  56.13,77.85 0 top
D25  RED  [LED-0603]  83.31,126.75 90 top
D26  Yellow  [LED-0603]  93.47,126.75 90 top
D27  PRTR5V0U2F  [SOT886]  79.5,77.85 0 top
D28  RED  [LED-0603]  106.68,126.75 90 top
D29  Yellow  [LED-0603]  116.84,126.75 90 top
D30  PRTR5V0U2F  [SOT886]  102.87,77.85 0 top
D31  RED  [LED-0603]  13.21,188.21 90 top
D32  Yellow  [LED-0603]  23.37,188.21 90 top
D33  PRTR5V0U2F  [SOT886]  9.4,139.32 0 top
D34  RED  [LED-0603]  36.58,188.21 90 top
D35  Yellow  [LED-0603]  46.74,188.21 90 top
D36  PRTR5V0U2F  [SOT886]  32.77,139.32 0 top
D37  RED  [LED-0603]  59.94,188.21 90 top
D38  Yellow  [LED-0603]  70.1,188.21 90 top
D39  PRTR5V0U2F  [SOT886]  56.13,139.32 0 top
D40  RED  [LED-0603]  83.31,188.21 90 top
D41  Yellow  [LED-0603]  93.47,188.21 90 top
D42  PRTR5V0U2F  [SOT886]  79.5,139.32 0 top
D43  RED  [LED-0603]  106.68,188.21 90 top
D44  Yellow  [LED-0603]  116.84,188.21 90 top
D45  PRTR5V0U2F  [SOT886]  102.87,139.32 0 top
E$1  [FIDUCIAL-1X2]  4.23,190.63 0 top
E$2  [FIDUCIAL-1X2]  4.23,190.63 0 bottom
E$3  [FIDUCIAL-1X2]  125.81,190.63 0 top
E$4  [FIDUCIAL-1X2]  125.81,190.63 0 bottom
E$5  [FIDUCIAL-1.5X3]  4.23,15.75 0 top
E$6  [FIDUCIAL-1.5X3]  4.23,15.75 0 bottom
FD1  FIDUCIALUFIDUCIAL  [FIDUCIAL-MICRO]  7.49,63.37 0 top
FD2  FIDUCIALUFIDUCIAL  [FIDUCIAL-MICRO]  29.08,13.84 0 bottom
FD3  FIDUCIALUFIDUCIAL  [FIDUCIAL-MICRO]  29.08,13.84 0 top
FD4  FIDUCIALUFIDUCIAL  [FIDUCIAL-MICRO]  7.49,63.37 0 bottom
FD5  FIDUCIALUFIDUCIAL  [FIDUCIAL-MICRO]  30.86,63.37 0 top
FD6  FIDUCIALUFIDUCIAL  [FIDUCIAL-MICRO]  52.45,13.84 0 bottom
FD7  FIDUCIALUFIDUCIAL  [FIDUCIAL-MICRO]  52.45,13.84 0 top
FD8  FIDUCIALUFIDUCIAL  [FIDUCIAL-MICRO]  30.86,63.37 0 bottom
FD9  FIDUCIALUFIDUCIAL  [FIDUCIAL-MICRO]  54.23,63.37 0 top
FD10  FIDUCIALUFIDUCIAL  [FIDUCIAL-MICRO]  75.82,13.84 0 bottom
FD11  FIDUCIALUFIDUCIAL  [FIDUCIAL-MICRO]  75.82,13.84 0 top
FD12  FIDUCIALUFIDUCIAL  [FIDUCIAL-MICRO]  54.23,63.37 0 bottom
FD13  FIDUCIALUFIDUCIAL  [FIDUCIAL-MICRO]  77.6,63.37 0 top
FD14  FIDUCIALUFIDUCIAL  [FIDUCIAL-MICRO]  99.19,13.84 0 bottom
FD15  FIDUCIALUFIDUCIAL  [FIDUCIAL-MICRO]  99.19,13.84 0 top
FD16  FIDUCIALUFIDUCIAL  [FIDUCIAL-MICRO]  77.6,63.37 0 bottom
FD17  FIDUCIALUFIDUCIAL  [FIDUCIAL-MICRO]  100.97,63.37 0 top
FD18  FIDUCIALUFIDUCIAL  [FIDUCIAL-MICRO]  122.56,13.84 0 bottom
FD19  FIDUCIALUFIDUCIAL  [FIDUCIAL-MICRO]  122.56,13.84 0 top
FD20  FIDUCIALUFIDUCIAL  [FIDUCIAL-MICRO]  100.97,63.37 0 bottom
FD21  FIDUCIALUFIDUCIAL  [FIDUCIAL-MICRO]  7.49,124.84 0 top
FD22  FIDUCIALUFIDUCIAL  [FIDUCIAL-MICRO]  29.08,75.31 0 bottom
FD23  FIDUCIALUFIDUCIAL  [FIDUCIAL-MICRO]  29.08,75.31 0 top
FD24  FIDUCIALUFIDUCIAL  [FIDUCIAL-MICRO]  7.49,124.84 0 bottom
FD25  FIDUCIALUFIDUCIAL  [FIDUCIAL-MICRO]  30.86,124.84 0 top
FD26  FIDUCIALUFIDUCIAL  [FIDUCIAL-MICRO]  52.45,75.31 0 bottom
FD27  FIDUCIALUFIDUCIAL  [FIDUCIAL-MICRO]  52.45,75.31 0 top
FD28  FIDUCIALUFIDUCIAL  [FIDUCIAL-MICRO]  30.86,124.84 0 bottom
FD29  FIDUCIALUFIDUCIAL  [FIDUCIAL-MICRO]  54.23,124.84 0 top
FD30  FIDUCIALUFIDUCIAL  [FIDUCIAL-MICRO]  75.82,75.31 0 bottom
FD31  FIDUCIALUFIDUCIAL  [FIDUCIAL-MICRO]  75.82,75.31 0 top
FD32  FIDUCIALUFIDUCIAL  [FIDUCIAL-MICRO]  54.23,124.84 0 bottom
FD33  FIDUCIALUFIDUCIAL  [FIDUCIAL-MICRO]  77.6,124.84 0 top
FD34  FIDUCIALUFIDUCIAL  [FIDUCIAL-MICRO]  99.19,75.31 0 bottom
FD35  FIDUCIALUFIDUCIAL  [FIDUCIAL-MICRO]  99.19,75.31 0 top
FD36  FIDUCIALUFIDUCIAL  [FIDUCIAL-MICRO]  77.6,124.84 0 bottom
FD37  FIDUCIALUFIDUCIAL  [FIDUCIAL-MICRO]  100.97,124.84 0 top
FD38  FIDUCIALUFIDUCIAL  [FIDUCIAL-MICRO]  122.56,75.31 0 bottom
FD39  FIDUCIALUFIDUCIAL  [FIDUCIAL-MICRO]  122.56,75.31 0 top
FD40  FIDUCIALUFIDUCIAL  [FIDUCIAL-MICRO]  100.97,124.84 0 bottom
FD41  FIDUCIALUFIDUCIAL  [FIDUCIAL-MICRO]  7.49,186.31 0 top
FD42  FIDUCIALUFIDUCIAL  [FIDUCIAL-MICRO]  29.08,136.78 0 bottom
FD43  FIDUCIALUFIDUCIAL  [FIDUCIAL-MICRO]  29.08,136.78 0 top
FD44  FIDUCIALUFIDUCIAL  [FIDUCIAL-MICRO]  7.49,186.31 0 bottom
FD45  FIDUCIALUFIDUCIAL  [FIDUCIAL-MICRO]  30.86,186.31 0 top
FD46  FIDUCIALUFIDUCIAL  [FIDUCIAL-MICRO]  52.45,136.78 0 bottom
FD47  FIDUCIALUFIDUCIAL  [FIDUCIAL-MICRO]  52.45,136.78 0 top
FD48  FIDUCIALUFIDUCIAL  [FIDUCIAL-MICRO]  30.86,186.31 0 bottom
FD49  FIDUCIALUFIDUCIAL  [FIDUCIAL-MICRO]  54.23,186.31 0 top
FD50  FIDUCIALUFIDUCIAL  [FIDUCIAL-MICRO]  75.82,136.78 0 bottom
FD51  FIDUCIALUFIDUCIAL  [FIDUCIAL-MICRO]  75.82,136.78 0 top
FD52  FIDUCIALUFIDUCIAL  [FIDUCIAL-MICRO]  54.23,186.31 0 bottom
FD53  FIDUCIALUFIDUCIAL  [FIDUCIAL-MICRO]  77.6,186.31 0 top
FD54  FIDUCIALUFIDUCIAL  [FIDUCIAL-MICRO]  99.19,136.78 0 bottom
FD55  FIDUCIALUFIDUCIAL  [FIDUCIAL-MICRO]  99.19,136.78 0 top
FD56  FIDUCIALUFIDUCIAL  [FIDUCIAL-MICRO]  77.6,186.31 0 bottom
FD57  FIDUCIALUFIDUCIAL  [FIDUCIAL-MICRO]  100.97,186.31 0 top
FD58  FIDUCIALUFIDUCIAL  [FIDUCIAL-MICRO]  122.56,136.78 0 bottom
FD59  FIDUCIALUFIDUCIAL  [FIDUCIAL-MICRO]  122.56,136.78 0 top
FD60  FIDUCIALUFIDUCIAL  [FIDUCIAL-MICRO]  100.97,186.31 0 bottom
GPIO1  TEST-POINT3  [PAD.03X.03]  41.66,39.88 0 bottom
GPIO2  TEST-POINT3  [PAD.03X.03]  65.02,39.88 0 bottom
GPIO3  TEST-POINT3  [PAD.03X.03]  88.39,39.88 0 bottom
GPIO4  TEST-POINT3  [PAD.03X.03]  111.76,39.88 0 bottom
GPIO5  TEST-POINT3  [PAD.03X.03]  18.29,101.35 0 bottom
GPIO6  TEST-POINT3  [PAD.03X.03]  41.66,101.35 0 bottom
GPIO7  TEST-POINT3  [PAD.03X.03]  65.02,101.35 0 bottom
GPIO8  TEST-POINT3  [PAD.03X.03]  88.39,101.35 0 bottom
GPIO9  TEST-POINT3  [PAD.03X.03]  111.76,101.35 0 bottom
GPIO10  TEST-POINT3  [PAD.03X.03]  18.29,39.88 0 bottom
GPIO11  TEST-POINT3  [PAD.03X.03]  18.29,162.81 0 bottom
GPIO12  TEST-POINT3  [PAD.03X.03]  41.66,162.81 0 bottom
GPIO13  TEST-POINT3  [PAD.03X.03]  65.02,162.81 0 bottom
GPIO14  TEST-POINT3  [PAD.03X.03]  88.39,162.81 0 bottom
GPIO15  TEST-POINT3  [PAD.03X.03]  111.76,162.81 0 bottom
H1  STAND-OFF  [STAND-OFF]  27.18,65.28 0 top
H2  STAND-OFF  [STAND-OFF]  9.4,65.28 0 top
H3  STAND-OFF  [STAND-OFF]  27.18,11.94 0 top
H4  STAND-OFF  [STAND-OFF]  9.4,11.94 0 top
H5  STAND-OFF  [STAND-OFF]  50.55,65.28 0 top
H6  STAND-OFF  [STAND-OFF]  32.77,65.28 0 top
H7  STAND-OFF  [STAND-OFF]  50.55,11.94 0 top
H8  STAND-OFF  [STAND-OFF]  32.77,11.94 0 top
H9  STAND-OFF  [STAND-OFF]  73.91,65.28 0 top
H10  STAND-OFF  [STAND-OFF]  56.13,65.28 0 top
H11  STAND-OFF  [STAND-OFF]  73.91,11.94 0 top
H12  STAND-OFF  [STAND-OFF]  56.13,11.94 0 top
H13  STAND-OFF  [STAND-OFF]  97.28,65.28 0 top
H14  STAND-OFF  [STAND-OFF]  79.5,65.28 0 top
H15  STAND-OFF  [STAND-OFF]  97.28,11.94 0 top
H16  STAND-OFF  [STAND-OFF]  79.5,11.94 0 top
H17  STAND-OFF  [STAND-OFF]  120.65,65.28 0 top
H18  STAND-OFF  [STAND-OFF]  102.87,65.28 0 top
H19  STAND-OFF  [STAND-OFF]  120.65,11.94 0 top
H20  STAND-OFF  [STAND-OFF]  102.87,11.94 0 top
H21  STAND-OFF  [STAND-OFF]  27.18,126.75 0 top
H22  STAND-OFF  [STAND-OFF]  9.4,126.75 0 top
H23  STAND-OFF  [STAND-OFF]  27.18,73.41 0 top
H24  STAND-OFF  [STAND-OFF]  9.4,73.41 0 top
H25  STAND-OFF  [STAND-OFF]  50.55,126.75 0 top
H26  STAND-OFF  [STAND-OFF]  32.77,126.75 0 top
H27  STAND-OFF  [STAND-OFF]  50.55,73.41 0 top
H28  STAND-OFF  [STAND-OFF]  32.77,73.41 0 top
H29  STAND-OFF  [STAND-OFF]  73.91,126.75 0 top
H30  STAND-OFF  [STAND-OFF]  56.13,126.75 0 top
H31  STAND-OFF  [STAND-OFF]  73.91,73.41 0 top
H32  STAND-OFF  [STAND-OFF]  56.13,73.41 0 top
H33  STAND-OFF  [STAND-OFF]  97.28,126.75 0 top
H34  STAND-OFF  [STAND-OFF]  79.5,126.75 0 top
H35  STAND-OFF  [STAND-OFF]  97.28,73.41 0 top
H36  STAND-OFF  [STAND-OFF]  79.5,73.41 0 top
H37  STAND-OFF  [STAND-OFF]  120.65,126.75 0 top
H38  STAND-OFF  [STAND-OFF]  102.87,126.75 0 top
H39  STAND-OFF  [STAND-OFF]  120.65,73.41 0 top
H40  STAND-OFF  [STAND-OFF]  102.87,73.41 0 top
H41  STAND-OFF  [STAND-OFF]  27.18,188.21 0 top
H42  STAND-OFF  [STAND-OFF]  9.4,188.21 0 top
H43  STAND-OFF  [STAND-OFF]  27.18,134.87 0 top
H44  STAND-OFF  [STAND-OFF]  9.4,134.87 0 top
H45  STAND-OFF  [STAND-OFF]  50.55,188.21 0 top
H46  STAND-OFF  [STAND-OFF]  32.77,188.21 0 top
H47  STAND-OFF  [STAND-OFF]  50.55,134.87 0 top
H48  STAND-OFF  [STAND-OFF]  32.77,134.87 0 top
H49  STAND-OFF  [STAND-OFF]  73.91,188.21 0 top
H50  STAND-OFF  [STAND-OFF]  56.13,188.21 0 top
H51  STAND-OFF  [STAND-OFF]  73.91,134.87 0 top
H52  STAND-OFF  [STAND-OFF]  56.13,134.87 0 top
H53  STAND-OFF  [STAND-OFF]  97.28,188.21 0 top
H54  STAND-OFF  [STAND-OFF]  79.5,188.21 0 top
H55  STAND-OFF  [STAND-OFF]  97.28,134.87 0 top
H56  STAND-OFF  [STAND-OFF]  79.5,134.87 0 top
H57  STAND-OFF  [STAND-OFF]  120.65,188.21 0 top
H58  STAND-OFF  [STAND-OFF]  102.87,188.21 0 top
H59  STAND-OFF  [STAND-OFF]  120.65,134.87 0 top
H60  STAND-OFF  [STAND-OFF]  102.87,134.87 0 top
I2C  JUMPER-SMT_3_2-NC_TRACE_SILK  [SMT-JUMPER_3_2-NC_TRACE_SILK]  11.3,56.39 180 bottom
I2C1  JUMPER-SMT_3_2-NC_TRACE_SILK  [SMT-JUMPER_3_2-NC_TRACE_SILK]  34.67,56.39 180 bottom
I2C2  JUMPER-SMT_3_2-NC_TRACE_SILK  [SMT-JUMPER_3_2-NC_TRACE_SILK]  58.04,56.39 180 bottom
I2C3  JUMPER-SMT_3_2-NC_TRACE_SILK  [SMT-JUMPER_3_2-NC_TRACE_SILK]  81.41,56.39 180 bottom
I2C4  JUMPER-SMT_3_2-NC_TRACE_SILK  [SMT-JUMPER_3_2-NC_TRACE_SILK]  104.78,56.39 180 bottom
I2C5  JUMPER-SMT_3_2-NC_TRACE_SILK  [SMT-JUMPER_3_2-NC_TRACE_SILK]  11.3,117.86 180 bottom
I2C6  JUMPER-SMT_3_2-NC_TRACE_SILK  [SMT-JUMPER_3_2-NC_TRACE_SILK]  34.67,117.86 180 bottom
I2C7  JUMPER-SMT_3_2-NC_TRACE_SILK  [SMT-JUMPER_3_2-NC_TRACE_SILK]  58.04,117.86 180 bottom
I2C8  JUMPER-SMT_3_2-NC_TRACE_SILK  [SMT-JUMPER_3_2-NC_TRACE_SILK]  81.41,117.86 180 bottom
I2C9  JUMPER-SMT_3_2-NC_TRACE_SILK  [SMT-JUMPER_3_2-NC_TRACE_SILK]  104.78,117.86 180 bottom
I2C10  JUMPER-SMT_3_2-NC_TRACE_SILK  [SMT-JUMPER_3_2-NC_TRACE_SILK]  11.3,179.32 180 bottom
I2C11  JUMPER-SMT_3_2-NC_TRACE_SILK  [SMT-JUMPER_3_2-NC_TRACE_SILK]  34.67,179.32 180 bottom
I2C12  JUMPER-SMT_3_2-NC_TRACE_SILK  [SMT-JUMPER_3_2-NC_TRACE_SILK]  58.04,179.32 180 bottom
I2C13  JUMPER-SMT_3_2-NC_TRACE_SILK  [SMT-JUMPER_3_2-NC_TRACE_SILK]  81.41,179.32 180 bottom
I2C14  JUMPER-SMT_3_2-NC_TRACE_SILK  [SMT-JUMPER_3_2-NC_TRACE_SILK]  104.78,179.32 180 bottom
IC1  USB224X_2241_V04  [36-QFN]  18.29,42.42 315 top
IC2  USB224X_2241_V04  [36-QFN]  41.66,42.42 315 top
IC3  USB224X_2241_V04  [36-QFN]  65.02,42.42 315 top
IC4  USB224X_2241_V04  [36-QFN]  88.39,42.42 315 top
IC5  USB224X_2241_V04  [36-QFN]  111.76,42.42 315 top
IC6  USB224X_2241_V04  [36-QFN]  18.29,103.89 315 top
IC7  USB224X_2241_V04  [36-QFN]  41.66,103.89 315 top
IC8  USB224X_2241_V04  [36-QFN]  65.02,103.89 315 top
IC9  USB224X_2241_V04  [36-QFN]  88.39,103.89 315 top
IC10  USB224X_2241_V04  [36-QFN]  111.76,103.89 315 top
IC11  USB224X_2241_V04  [36-QFN]  18.29,165.35 315 top
IC12  USB224X_2241_V04  [36-QFN]  41.66,165.35 315 top
IC13  USB224X_2241_V04  [36-QFN]  65.02,165.35 315 top
IC14  USB224X_2241_V04  [36-QFN]  88.39,165.35 315 top
IC15  USB224X_2241_V04  [36-QFN]  111.76,165.35 315 top
J1  [USB-C-16P_4LAYER-PADS]  18.29,16.07 0 top
J2  MICRO-SD-PUSH-PUSH-EXT-PIN  [MICROSD-EXTERNALPIN]  13.21,25.34 270 top
J3  AVR_SPI_PROG_3X2TESTPOINTS  [2X3_TEST_POINTS]  18.29,65.28 0 bottom
J4  THING_PLUS  [THING_PLUS]  6.86,9.4 0 top
J5  [USB-C-16P_4LAYER-PADS]  41.66,16.07 0 top
J6  MICRO-SD-PUSH-PUSH-EXT-PIN  [MICROSD-EXTERNALPIN]  36.58,25.34 270 top
J7  AVR_SPI_PROG_3X2TESTPOINTS  [2X3_TEST_POINTS]  41.66,65.28 0 bottom
J8  THING_PLUS  [THING_PLUS]  30.23,9.4 0 top
J9  [USB-C-16P_4LAYER-PADS]  65.02,16.07 0 top
J10  MICRO-SD-PUSH-PUSH-EXT-PIN  [MICROSD-EXTERNALPIN]  59.94,25.34 270 top
J11  AVR_SPI_PROG_3X2TESTPOINTS  [2X3_TEST_POINTS]  65.02,65.28 0 bottom
J12  THING_PLUS  [THING_PLUS]  53.59,9.4 0 top
J13  [USB-C-16P_4LAYER-PADS]  88.39,16.07 0 top
J14  MICRO-SD-PUSH-PUSH-EXT-PIN  [MICROSD-EXTERNALPIN]  83.31,25.34 270 top
J15  AVR_SPI_PROG_3X2TESTPOINTS  [2X3_TEST_POINTS]  88.39,65.28 0 bottom
J16  THING_PLUS  [THING_PLUS]  76.96,9.4 0 top
J17  [USB-C-16P_4LAYER-PADS]  111.76,16.07 0 top
J18  MICRO-SD-PUSH-PUSH-EXT-PIN  [MICROSD-EXTERNALPIN]  106.68,25.34 270 top
J19  AVR_SPI_PROG_3X2TESTPOINTS  [2X3_TEST_POINTS]  111.76,65.28 0 bottom
J20  THING_PLUS  [THING_PLUS]  100.33,9.4 0 top
J21  [USB-C-16P_4LAYER-PADS]  18.29,77.53 0 top
J22  MICRO-SD-PUSH-PUSH-EXT-PIN  [MICROSD-EXTERNALPIN]  13.21,86.8 270 top
J23  AVR_SPI_PROG_3X2TESTPOINTS  [2X3_TEST_POINTS]  18.29,126.75 0 bottom
J24  THING_PLUS  [THING_PLUS]  6.86,70.87 0 top
J25  [USB-C-16P_4LAYER-PADS]  41.66,77.53 0 top
J26  MICRO-SD-PUSH-PUSH-EXT-PIN  [MICROSD-EXTERNALPIN]  36.58,86.8 270 top
J27  AVR_SPI_PROG_3X2TESTPOINTS  [2X3_TEST_POINTS]  41.66,126.75 0 bottom
J28  THING_PLUS  [THING_PLUS]  30.23,70.87 0 top
J29  [USB-C-16P_4LAYER-PADS]  65.02,77.53 0 top
J30  MICRO-SD-PUSH-PUSH-EXT-PIN  [MICROSD-EXTERNALPIN]  59.94,86.8 270 top
J31  AVR_SPI_PROG_3X2TESTPOINTS  [2X3_TEST_POINTS]  65.02,126.75 0 bottom
J32  THING_PLUS  [THING_PLUS]  53.59,70.87 0 top
J33  [USB-C-16P_4LAYER-PADS]  88.39,77.53 0 top
J34  MICRO-SD-PUSH-PUSH-EXT-PIN  [MICROSD-EXTERNALPIN]  83.31,86.8 270 top
J35  AVR_SPI_PROG_3X2TESTPOINTS  [2X3_TEST_POINTS]  88.39,126.75 0 bottom
J36  THING_PLUS  [THING_PLUS]  76.96,70.87 0 top
J37  [USB-C-16P_4LAYER-PADS]  111.76,77.53 0 top
J38  MICRO-SD-PUSH-PUSH-EXT-PIN  [MICROSD-EXTERNALPIN]  106.68,86.8 270 top
J39  AVR_SPI_PROG_3X2TESTPOINTS  [2X3_TEST_POINTS]  111.76,126.75 0 bottom
J40  THING_PLUS  [THING_PLUS]  100.33,70.87 0 top
J41  [USB-C-16P_4LAYER-PADS]  18.29,139 0 top
J42  MICRO-SD-PUSH-PUSH-EXT-PIN  [MICROSD-EXTERNALPIN]  13.21,148.27 270 top
J43  AVR_SPI_PROG_3X2TESTPOINTS  [2X3_TEST_POINTS]  18.29,188.21 0 bottom
J44  THING_PLUS  [THING_PLUS]  6.86,132.33 0 top
J45  [USB-C-16P_4LAYER-PADS]  41.66,139 0 top
J46  MICRO-SD-PUSH-PUSH-EXT-PIN  [MICROSD-EXTERNALPIN]  36.58,148.27 270 top
J47  AVR_SPI_PROG_3X2TESTPOINTS  [2X3_TEST_POINTS]  41.66,188.21 0 bottom
J48  THING_PLUS  [THING_PLUS]  30.23,132.33 0 top
J49  [USB-C-16P_4LAYER-PADS]  65.02,139 0 top
J50  MICRO-SD-PUSH-PUSH-EXT-PIN  [MICROSD-EXTERNALPIN]  59.94,148.27 270 top
J51  AVR_SPI_PROG_3X2TESTPOINTS  [2X3_TEST_POINTS]  65.02,188.21 0 bottom
J52  THING_PLUS  [THING_PLUS]  53.59,132.33 0 top
J53  [USB-C-16P_4LAYER-PADS]  88.39,139 0 top
J54  MICRO-SD-PUSH-PUSH-EXT-PIN  [MICROSD-EXTERNALPIN]  83.31,148.27 270 top
J55  AVR_SPI_PROG_3X2TESTPOINTS  [2X3_TEST_POINTS]  88.39,188.21 0 bottom
J56  THING_PLUS  [THING_PLUS]  76.96,132.33 0 top
J57  [USB-C-16P_4LAYER-PADS]  111.76,139 0 top
J58  MICRO-SD-PUSH-PUSH-EXT-PIN  [MICROSD-EXTERNALPIN]  106.68,148.27 270 top
J59  AVR_SPI_PROG_3X2TESTPOINTS  [2X3_TEST_POINTS]  111.76,188.21 0 bottom
J60  THING_PLUS  [THING_PLUS]  100.33,132.33 0 top
JP1  JUMPER-SMT_2_NC_TRACE_SILK  [SMT-JUMPER_2_NC_TRACE_SILK]  25.91,46.23 0 bottom
JP2  JUMPER-SMT_2_NO_SILK  [SMT-JUMPER_2_NO_SILK]  25.91,43.69 0 bottom
JP3  JUMPER-SMT_2_NO_SILK  [SMT-JUMPER_2_NO_SILK]  25.91,41.15 0 bottom
JP4  USB_SOLDER_PADS  [USB-SOLDER-PADS]  18.29,11.3 270 bottom
JP5  JUMPER-SMT_2_NC_TRACE_SILK  [SMT-JUMPER_2_NC_TRACE_SILK]  49.28,46.23 0 bottom
JP6  JUMPER-SMT_2_NO_SILK  [SMT-JUMPER_2_NO_SILK]  49.28,43.69 0 bottom
JP7  JUMPER-SMT_2_NO_SILK  [SMT-JUMPER_2_NO_SILK]  49.28,41.15 0 bottom
JP8  USB_SOLDER_PADS  [USB-SOLDER-PADS]  41.66,11.3 270 bottom
JP9  JUMPER-SMT_2_NC_TRACE_SILK  [SMT-JUMPER_2_NC_TRACE_SILK]  72.64,46.23 0 bottom
JP10  JUMPER-SMT_2_NO_SILK  [SMT-JUMPER_2_NO_SILK]  72.64,43.69 0 bottom
JP11  JUMPER-SMT_2_NO_SILK  [SMT-JUMPER_2_NO_SILK]  72.64,41.15 0 bottom
JP12  USB_SOLDER_PADS  [USB-SOLDER-PADS]  65.02,11.3 270 bottom
JP13  JUMPER-SMT_2_NC_TRACE_SILK  [SMT-JUMPER_2_NC_TRACE_SILK]  96.01,46.23 0 bottom
JP14  JUMPER-SMT_2_NO_SILK  [SMT-JUMPER_2_NO_SILK]  96.01,43.69 0 bottom
JP15  JUMPER-SMT_2_NO_SILK  [SMT-JUMPER_2_NO_SILK]  96.01,41.15 0 bottom
JP16  USB_SOLDER_PADS  [USB-SOLDER-PADS]  88.39,11.3 270 bottom
JP17  JUMPER-SMT_2_NC_TRACE_SILK  [SMT-JUMPER_2_NC_TRACE_SILK]  119.38,46.23 0 bottom
JP18  JUMPER-SMT_2_NO_SILK  [SMT-JUMPER_2_NO_SILK]  119.38,43.69 0 bottom
JP19  JUMPER-SMT_2_NO_SILK  [SMT-JUMPER_2_NO_SILK]  119.38,41.15 0 bottom
JP20  USB_SOLDER_PADS  [USB-SOLDER-PADS]  111.76,11.3 270 bottom
JP21  JUMPER-SMT_2_NC_TRACE_SILK  [SMT-JUMPER_2_NC_TRACE_SILK]  25.91,107.7 0 bottom
JP22  JUMPER-SMT_2_NO_SILK  [SMT-JUMPER_2_NO_SILK]  25.91,105.16 0 bottom
JP23  JUMPER-SMT_2_NO_SILK  [SMT-JUMPER_2_NO_SILK]  25.91,102.62 0 bottom
JP24  USB_SOLDER_PADS  [USB-SOLDER-PADS]  18.29,72.77 270 bottom
JP25  JUMPER-SMT_2_NC_TRACE_SILK  [SMT-JUMPER_2_NC_TRACE_SILK]  49.28,107.7 0 bottom
JP26  JUMPER-SMT_2_NO_SILK  [SMT-JUMPER_2_NO_SILK]  49.28,105.16 0 bottom
JP27  JUMPER-SMT_2_NO_SILK  [SMT-JUMPER_2_NO_SILK]  49.28,102.62 0 bottom
JP28  USB_SOLDER_PADS  [USB-SOLDER-PADS]  41.66,72.77 270 bottom
JP29  JUMPER-SMT_2_NC_TRACE_SILK  [SMT-JUMPER_2_NC_TRACE_SILK]  72.64,107.7 0 bottom
JP30  JUMPER-SMT_2_NO_SILK  [SMT-JUMPER_2_NO_SILK]  72.64,105.16 0 bottom
JP31  JUMPER-SMT_2_NO_SILK  [SMT-JUMPER_2_NO_SILK]  72.64,102.62 0 bottom
JP32  USB_SOLDER_PADS  [USB-SOLDER-PADS]  65.02,72.77 270 bottom
JP33  JUMPER-SMT_2_NC_TRACE_SILK  [SMT-JUMPER_2_NC_TRACE_SILK]  96.01,107.7 0 bottom
JP34  JUMPER-SMT_2_NO_SILK  [SMT-JUMPER_2_NO_SILK]  96.01,105.16 0 bottom
JP35  JUMPER-SMT_2_NO_SILK  [SMT-JUMPER_2_NO_SILK]  96.01,102.62 0 bottom
JP36  USB_SOLDER_PADS  [USB-SOLDER-PADS]  88.39,72.77 270 bottom
JP37  JUMPER-SMT_2_NC_TRACE_SILK  [SMT-JUMPER_2_NC_TRACE_SILK]  119.38,107.7 0 bottom
JP38  JUMPER-SMT_2_NO_SILK  [SMT-JUMPER_2_NO_SILK]  119.38,105.16 0 bottom
JP39  JUMPER-SMT_2_NO_SILK  [SMT-JUMPER_2_NO_SILK]  119.38,102.62 0 bottom
JP40  USB_SOLDER_PADS  [USB-SOLDER-PADS]  111.76,72.77 270 bottom
JP41  JUMPER-SMT_2_NC_TRACE_SILK  [SMT-JUMPER_2_NC_TRACE_SILK]  25.91,169.16 0 bottom
JP42  JUMPER-SMT_2_NO_SILK  [SMT-JUMPER_2_NO_SILK]  25.91,166.62 0 bottom
JP43  JUMPER-SMT_2_NO_SILK  [SMT-JUMPER_2_NO_SILK]  25.91,164.08 0 bottom
JP44  USB_SOLDER_PADS  [USB-SOLDER-PADS]  18.29,134.24 270 bottom
JP45  JUMPER-SMT_2_NC_TRACE_SILK  [SMT-JUMPER_2_NC_TRACE_SILK]  49.28,169.16 0 bottom
JP46  JUMPER-SMT_2_NO_SILK  [SMT-JUMPER_2_NO_SILK]  49.28,166.62 0 bottom
JP47  JUMPER-SMT_2_NO_SILK  [SMT-JUMPER_2_NO_SILK]  49.28,164.08 0 bottom
JP48  USB_SOLDER_PADS  [USB-SOLDER-PADS]  41.66,134.24 270 bottom
JP49  JUMPER-SMT_2_NC_TRACE_SILK  [SMT-JUMPER_2_NC_TRACE_SILK]  72.64,169.16 0 bottom
JP50  JUMPER-SMT_2_NO_SILK  [SMT-JUMPER_2_NO_SILK]  72.64,166.62 0 bottom
JP51  JUMPER-SMT_2_NO_SILK  [SMT-JUMPER_2_NO_SILK]  72.64,164.08 0 bottom
JP52  USB_SOLDER_PADS  [USB-SOLDER-PADS]  65.02,134.24 270 bottom
JP53  JUMPER-SMT_2_NC_TRACE_SILK  [SMT-JUMPER_2_NC_TRACE_SILK]  96.01,169.16 0 bottom
JP54  JUMPER-SMT_2_NO_SILK  [SMT-JUMPER_2_NO_SILK]  96.01,166.62 0 bottom
JP55  JUMPER-SMT_2_NO_SILK  [SMT-JUMPER_2_NO_SILK]  96.01,164.08 0 bottom
JP56  USB_SOLDER_PADS  [USB-SOLDER-PADS]  88.39,134.24 270 bottom
JP57  JUMPER-SMT_2_NC_TRACE_SILK  [SMT-JUMPER_2_NC_TRACE_SILK]  119.38,169.16 0 bottom
JP58  JUMPER-SMT_2_NO_SILK  [SMT-JUMPER_2_NO_SILK]  119.38,166.62 0 bottom
JP59  JUMPER-SMT_2_NO_SILK  [SMT-JUMPER_2_NO_SILK]  119.38,164.08 0 bottom
JP60  USB_SOLDER_PADS  [USB-SOLDER-PADS]  111.76,134.24 270 bottom
LED1  JUMPER-SMT_2_NC_TRACE_SILK  [SMT-JUMPER_2_NC_TRACE_SILK]  13.34,65.28 90 bottom
LED2  JUMPER-SMT_2_NC_TRACE_SILK  [SMT-JUMPER_2_NC_TRACE_SILK]  23.24,65.28 90 bottom
LED3  JUMPER-SMT_2_NC_TRACE_SILK  [SMT-JUMPER_2_NC_TRACE_SILK]  36.7,65.28 90 bottom
LED4  JUMPER-SMT_2_NC_TRACE_SILK  [SMT-JUMPER_2_NC_TRACE_SILK]  46.61,65.28 90 bottom
LED5  JUMPER-SMT_2_NC_TRACE_SILK  [SMT-JUMPER_2_NC_TRACE_SILK]  60.07,65.28 90 bottom
LED6  JUMPER-SMT_2_NC_TRACE_SILK  [SMT-JUMPER_2_NC_TRACE_SILK]  69.98,65.28 90 bottom
LED7  JUMPER-SMT_2_NC_TRACE_SILK  [SMT-JUMPER_2_NC_TRACE_SILK]  83.44,65.28 90 bottom
LED8  JUMPER-SMT_2_NC_TRACE_SILK  [SMT-JUMPER_2_NC_TRACE_SILK]  93.34,65.28 90 bottom
LED9  JUMPER-SMT_2_NC_TRACE_SILK  [SMT-JUMPER_2_NC_TRACE_SILK]  106.81,65.28 90 bottom
LED10  JUMPER-SMT_2_NC_TRACE_SILK  [SMT-JUMPER_2_NC_TRACE_SILK]  116.71,65.28 90 bottom
LED11  JUMPER-SMT_2_NC_TRACE_SILK  [SMT-JUMPER_2_NC_TRACE_SILK]  13.34,126.75 90 bottom
LED12  JUMPER-SMT_2_NC_TRACE_SILK  [SMT-JUMPER_2_NC_TRACE_SILK]  23.24,126.75 90 bottom
LED13  JUMPER-SMT_2_NC_TRACE_SILK  [SMT-JUMPER_2_NC_TRACE_SILK]  36.7,126.75 90 bottom
LED14  JUMPER-SMT_2_NC_TRACE_SILK  [SMT-JUMPER_2_NC_TRACE_SILK]  46.61,126.75 90 bottom
LED15  JUMPER-SMT_2_NC_TRACE_SILK  [SMT-JUMPER_2_NC_TRACE_SILK]  60.07,126.75 90 bottom
LED16  JUMPER-SMT_2_NC_TRACE_SILK  [SMT-JUMPER_2_NC_TRACE_SILK]  69.98,126.75 90 bottom
LED17  JUMPER-SMT_2_NC_TRACE_SILK  [SMT-JUMPER_2_NC_TRACE_SILK]  83.44,126.75 90 bottom
LED18  JUMPER-SMT_2_NC_TRACE_SILK  [SMT-JUMPER_2_NC_TRACE_SILK]  93.34,126.75 90 bottom
LED19  JUMPER-SMT_2_NC_TRACE_SILK  [SMT-JUMPER_2_NC_TRACE_SILK]  106.81,126.75 90 bottom
LED20  JUMPER-SMT_2_NC_TRACE_SILK  [SMT-JUMPER_2_NC_TRACE_SILK]  116.71,126.75 90 bottom
LED21  JUMPER-SMT_2_NC_TRACE_SILK  [SMT-JUMPER_2_NC_TRACE_SILK]  13.34,188.21 90 bottom
LED22  JUMPER-SMT_2_NC_TRACE_SILK  [SMT-JUMPER_2_NC_TRACE_SILK]  23.24,188.21 90 bottom
LED23  JUMPER-SMT_2_NC_TRACE_SILK  [SMT-JUMPER_2_NC_TRACE_SILK]  36.7,188.21 90 bottom
LED24  JUMPER-SMT_2_NC_TRACE_SILK  [SMT-JUMPER_2_NC_TRACE_SILK]  46.61,188.21 90 bottom
LED25  JUMPER-SMT_2_NC_TRACE_SILK  [SMT-JUMPER_2_NC_TRACE_SILK]  60.07,188.21 90 bottom
LED26  JUMPER-SMT_2_NC_TRACE_SILK  [SMT-JUMPER_2_NC_TRACE_SILK]  69.98,188.21 90 bottom
LED27  JUMPER-SMT_2_NC_TRACE_SILK  [SMT-JUMPER_2_NC_TRACE_SILK]  83.44,188.21 90 bottom
LED28  JUMPER-SMT_2_NC_TRACE_SILK  [SMT-JUMPER_2_NC_TRACE_SILK]  93.34,188.21 90 bottom
LED29  JUMPER-SMT_2_NC_TRACE_SILK  [SMT-JUMPER_2_NC_TRACE_SILK]  106.81,188.21 90 bottom
LED30  JUMPER-SMT_2_NC_TRACE_SILK  [SMT-JUMPER_2_NC_TRACE_SILK]  116.71,188.21 90 bottom
LOGO1  OSHW-LOGOMINI  [OSHW-LOGO-MINI]  49.28,47.5 90 top
LOGO2  OSHW-LOGOMINI  [OSHW-LOGO-MINI]  25.91,47.5 90 top
LOGO3  OSHW-LOGOMINI  [OSHW-LOGO-MINI]  18.29,36.07 0 bottom
LOGO4  SFE_LOGO_FLAME.2_INCH  [SFE_LOGO_FLAME_.2]  24.64,60.83 90 top
LOGO5  SFE_LOGO_NAME_FLAME.1_INCH  [SFE_LOGO_NAME_FLAME_.1]  18.29,20.57 0 bottom
LOGO6  OSHW-LOGOMINI  [OSHW-LOGO-MINI]  41.66,36.07 0 bottom
LOGO7  SFE_LOGO_FLAME.2_INCH  [SFE_LOGO_FLAME_.2]  48.01,60.83 90 top
LOGO8  SFE_LOGO_NAME_FLAME.1_INCH  [SFE_LOGO_NAME_FLAME_.1]  41.66,20.57 0 bottom
LOGO9  OSHW-LOGOMINI  [OSHW-LOGO-MINI]  72.64,47.5 90 top
LOGO10  OSHW-LOGOMINI  [OSHW-LOGO-MINI]  65.02,36.07 0 bottom
LOGO11  SFE_LOGO_FLAME.2_INCH  [SFE_LOGO_FLAME_.2]  71.37,60.83 90 top
LOGO12  SFE_LOGO_NAME_FLAME.1_INCH  [SFE_LOGO_NAME_FLAME_.1]  65.02,20.57 0 bottom
LOGO13  OSHW-LOGOMINI  [OSHW-LOGO-MINI]  96.01,47.5 90 top
LOGO14  OSHW-LOGOMINI  [OSHW-LOGO-MINI]  88.39,36.07 0 bottom
LOGO15  SFE_LOGO_FLAME.2_INCH  [SFE_LOGO_FLAME_.2]  94.74,60.83 90 top
LOGO16  SFE_LOGO_NAME_FLAME.1_INCH  [SFE_LOGO_NAME_FLAME_.1]  88.39,20.57 0 bottom
LOGO17  OSHW-LOGOMINI  [OSHW-LOGO-MINI]  119.38,47.5 90 top
LOGO18  OSHW-LOGOMINI  [OSHW-LOGO-MINI]  111.76,36.07 0 bottom
LOGO19  SFE_LOGO_FLAME.2_INCH  [SFE_LOGO_FLAME_.2]  118.11,60.83 90 top
LOGO20  SFE_LOGO_NAME_FLAME.1_INCH  [SFE_LOGO_NAME_FLAME_.1]  111.76,20.57 0 bottom
LOGO21  OSHW-LOGOMINI  [OSHW-LOGO-MINI]  25.91,108.97 90 top
LOGO22  OSHW-LOGOMINI  [OSHW-LOGO-MINI]  18.29,97.54 0 bottom
LOGO23  SFE_LOGO_FLAME.2_INCH  [SFE_LOGO_FLAME_.2]  24.64,122.3 90 top
LOGO24  SFE_LOGO_NAME_FLAME.1_INCH  [SFE_LOGO_NAME_FLAME_.1]  18.29,82.04 0 bottom
LOGO25  OSHW-LOGOMINI  [OSHW-LOGO-MINI]  49.28,108.97 90 top
LOGO26  OSHW-LOGOMINI  [OSHW-LOGO-MINI]  41.66,97.54 0 bottom
LOGO27  SFE_LOGO_FLAME.2_INCH  [SFE_LOGO_FLAME_.2]  48.01,122.3 90 top
LOGO28  SFE_LOGO_NAME_FLAME.1_INCH  [SFE_LOGO_NAME_FLAME_.1]  41.66,82.04 0 bottom
LOGO29  OSHW-LOGOMINI  [OSHW-LOGO-MINI]  72.64,108.97 90 top
LOGO30  OSHW-LOGOMINI  [OSHW-LOGO-MINI]  65.02,97.54 0 bottom
LOGO31  SFE_LOGO_FLAME.2_INCH  [SFE_LOGO_FLAME_.2]  71.37,122.3 90 top
LOGO32  SFE_LOGO_NAME_FLAME.1_INCH  [SFE_LOGO_NAME_FLAME_.1]  65.02,82.04 0 bottom
LOGO33  OSHW-LOGOMINI  [OSHW-LOGO-MINI]  96.01,108.97 90 top
LOGO34  OSHW-LOGOMINI  [OSHW-LOGO-MINI]  88.39,97.54 0 bottom
LOGO35  SFE_LOGO_FLAME.2_INCH  [SFE_LOGO_FLAME_.2]  94.74,122.3 90 top
LOGO36  SFE_LOGO_NAME_FLAME.1_INCH  [SFE_LOGO_NAME_FLAME_.1]  88.39,82.04 0 bottom
LOGO37  OSHW-LOGOMINI  [OSHW-LOGO-MINI]  119.38,108.97 90 top
LOGO38  OSHW-LOGOMINI  [OSHW-LOGO-MINI]  111.76,97.54 0 bottom
LOGO39  SFE_LOGO_FLAME.2_INCH  [SFE_LOGO_FLAME_.2]  118.11,122.3 90 top
LOGO40  SFE_LOGO_NAME_FLAME.1_INCH  [SFE_LOGO_NAME_FLAME_.1]  111.76,82.04 0 bottom
LOGO41  OSHW-LOGOMINI  [OSHW-LOGO-MINI]  25.91,170.43 90 top
LOGO42  OSHW-LOGOMINI  [OSHW-LOGO-MINI]  18.29,159 0 bottom
LOGO43  SFE_LOGO_FLAME.2_INCH  [SFE_LOGO_FLAME_.2]  24.64,183.77 90 top
LOGO44  SFE_LOGO_NAME_FLAME.1_INCH  [SFE_LOGO_NAME_FLAME_.1]  18.29,143.51 0 bottom
LOGO45  OSHW-LOGOMINI  [OSHW-LOGO-MINI]  49.28,170.43 90 top
LOGO46  OSHW-LOGOMINI  [OSHW-LOGO-MINI]  41.66,159 0 bottom
LOGO47  SFE_LOGO_FLAME.2_INCH  [SFE_LOGO_FLAME_.2]  48.01,183.77 90 top
LOGO48  SFE_LOGO_NAME_FLAME.1_INCH  [SFE_LOGO_NAME_FLAME_.1]  41.66,143.51 0 bottom
LOGO49  OSHW-LOGOMINI  [OSHW-LOGO-MINI]  72.64,170.43 90 top
LOGO50  OSHW-LOGOMINI  [OSHW-LOGO-MINI]  65.02,159 0 bottom
LOGO51  SFE_LOGO_FLAME.2_INCH  [SFE_LOGO_FLAME_.2]  71.37,183.77 90 top
LOGO52  SFE_LOGO_NAME_FLAME.1_INCH  [SFE_LOGO_NAME_FLAME_.1]  65.02,143.51 0 bottom
LOGO53  OSHW-LOGOMINI  [OSHW-LOGO-MINI]  96.01,170.43 90 top
LOGO54  OSHW-LOGOMINI  [OSHW-LOGO-MINI]  88.39,159 0 bottom
LOGO55  SFE_LOGO_FLAME.2_INCH  [SFE_LOGO_FLAME_.2]  94.74,183.77 90 top
LOGO56  SFE_LOGO_NAME_FLAME.1_INCH  [SFE_LOGO_NAME_FLAME_.1]  88.39,143.51 0 bottom
LOGO57  OSHW-LOGOMINI  [OSHW-LOGO-MINI]  119.38,170.43 90 top
LOGO58  OSHW-LOGOMINI  [OSHW-LOGO-MINI]  111.76,159 0 bottom
LOGO59  SFE_LOGO_FLAME.2_INCH  [SFE_LOGO_FLAME_.2]  118.11,183.77 90 top
LOGO60  SFE_LOGO_NAME_FLAME.1_INCH  [SFE_LOGO_NAME_FLAME_.1]  111.76,143.51 0 bottom
MICROSD_VCC  TEST-POINT3  [PAD.03X.03]  24.64,20.83 0 bottom
MICROSD_VCC1  TEST-POINT3  [PAD.03X.03]  48.01,20.83 0 bottom
MICROSD_VCC2  TEST-POINT3  [PAD.03X.03]  71.37,20.83 0 bottom
MICROSD_VCC3  TEST-POINT3  [PAD.03X.03]  94.74,20.83 0 bottom
MICROSD_VCC4  TEST-POINT3  [PAD.03X.03]  118.11,20.83 0 bottom
MICROSD_VCC5  TEST-POINT3  [PAD.03X.03]  24.64,82.3 0 bottom
MICROSD_VCC6  TEST-POINT3  [PAD.03X.03]  48.01,82.3 0 bottom
MICROSD_VCC7  TEST-POINT3  [PAD.03X.03]  71.37,82.3 0 bottom
MICROSD_VCC8  TEST-POINT3  [PAD.03X.03]  94.74,82.3 0 bottom
MICROSD_VCC9  TEST-POINT3  [PAD.03X.03]  118.11,82.3 0 bottom
MICROSD_VCC10  TEST-POINT3  [PAD.03X.03]  24.64,143.76 0 bottom
MICROSD_VCC11  TEST-POINT3  [PAD.03X.03]  48.01,143.76 0 bottom
MICROSD_VCC12  TEST-POINT3  [PAD.03X.03]  71.37,143.76 0 bottom
MICROSD_VCC13  TEST-POINT3  [PAD.03X.03]  94.74,143.76 0 bottom
MICROSD_VCC14  TEST-POINT3  [PAD.03X.03]  118.11,143.76 0 bottom
Q1  20V/4.2A/52mΩ/1.4W  [SOT23-3]  14.48,47.5 180 top
Q2  20V/0.2A/8MHz/1.2Ω/1Vth  [SOT-416FL]  12.95,45.97 270 top
Q3  20V/4.2A/52mΩ/1.4W  [SOT23-3]  26.54,18.92 90 top
Q4  20V/4.2A/52mΩ/1.4W  [SOT23-3]  15.75,55.63 0 top
Q5  [SOT363_PHILIPS]  15.75,52.58 180 top
Q6  20V/4.2A/52mΩ/1.4W  [SOT23-3]  22.73,55.63 0 top
Q7  [SOT363_PHILIPS]  22.73,52.58 180 top
Q8  20V/4.2A/52mΩ/1.4W  [SOT23-3]  37.85,47.5 180 top
Q9  20V/4.2A/52mΩ/1.4W  [SOT23-3]  49.91,18.92 90 top
Q10  20V/0.2A/8MHz/1.2Ω/1Vth  [SOT-416FL]  36.32,45.97 270 top